# Altium PCB JUNORPC6Cv3.PcbDoc (part 1 of 2)
Units mm, origin at the board's own origin, x right, y up, seen from the top; angles counter-clockwise.
Board outline 175.76 x 100.76 mm, 8 copper layers (Top Layer, Internal Plane 1, Signal Layer 1, Internal Plane 2, Signal Layer 2, Internal Plane 3, Internal Plane 4, Bottom Layer), stack 1.684 mm thick; 107 components, 160 nets, 1032 pads, 524 vias.
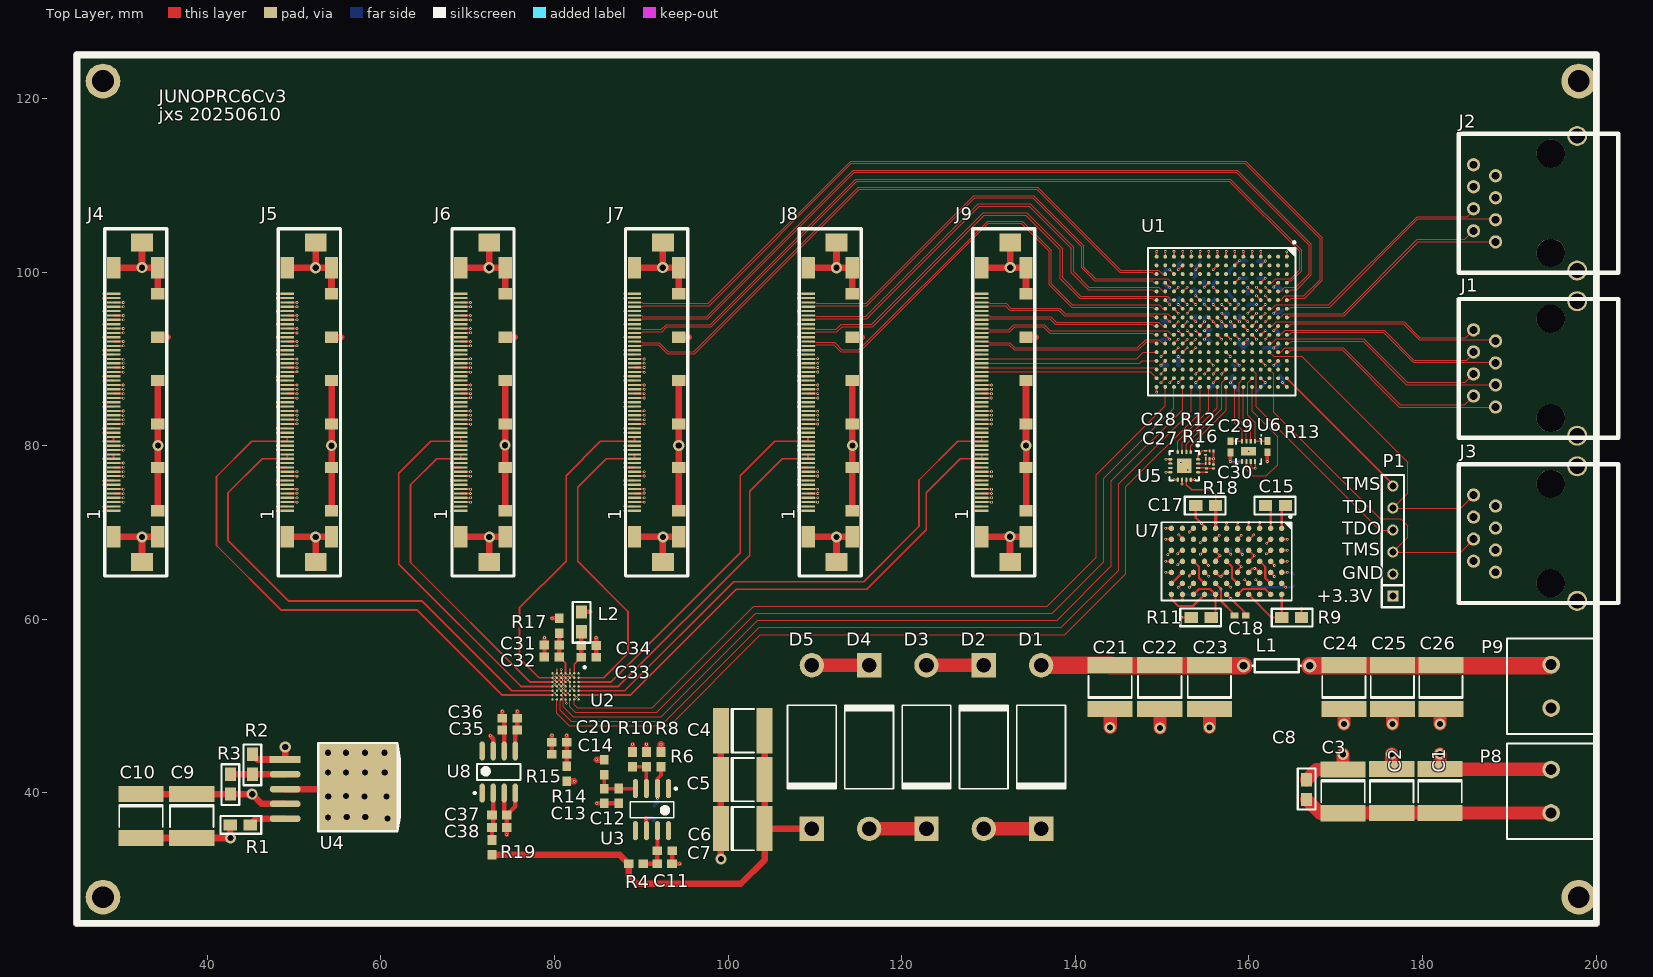
[diagram p0: Top Layer view]
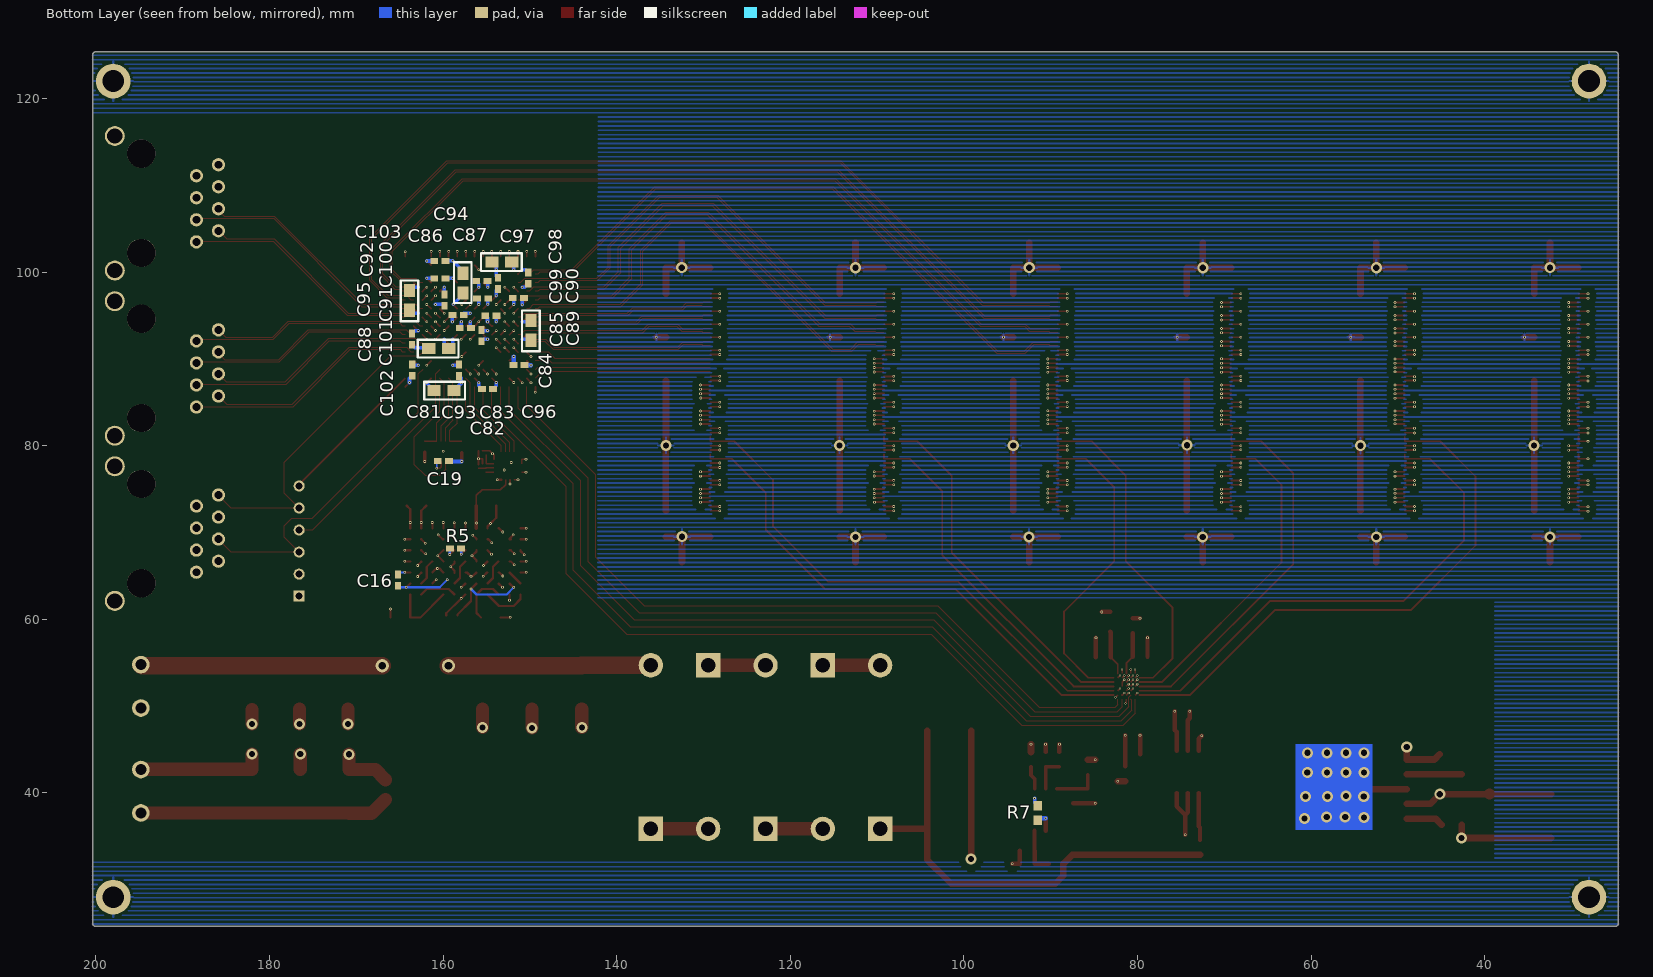
[diagram p1: Bottom Layer view, seen from below]
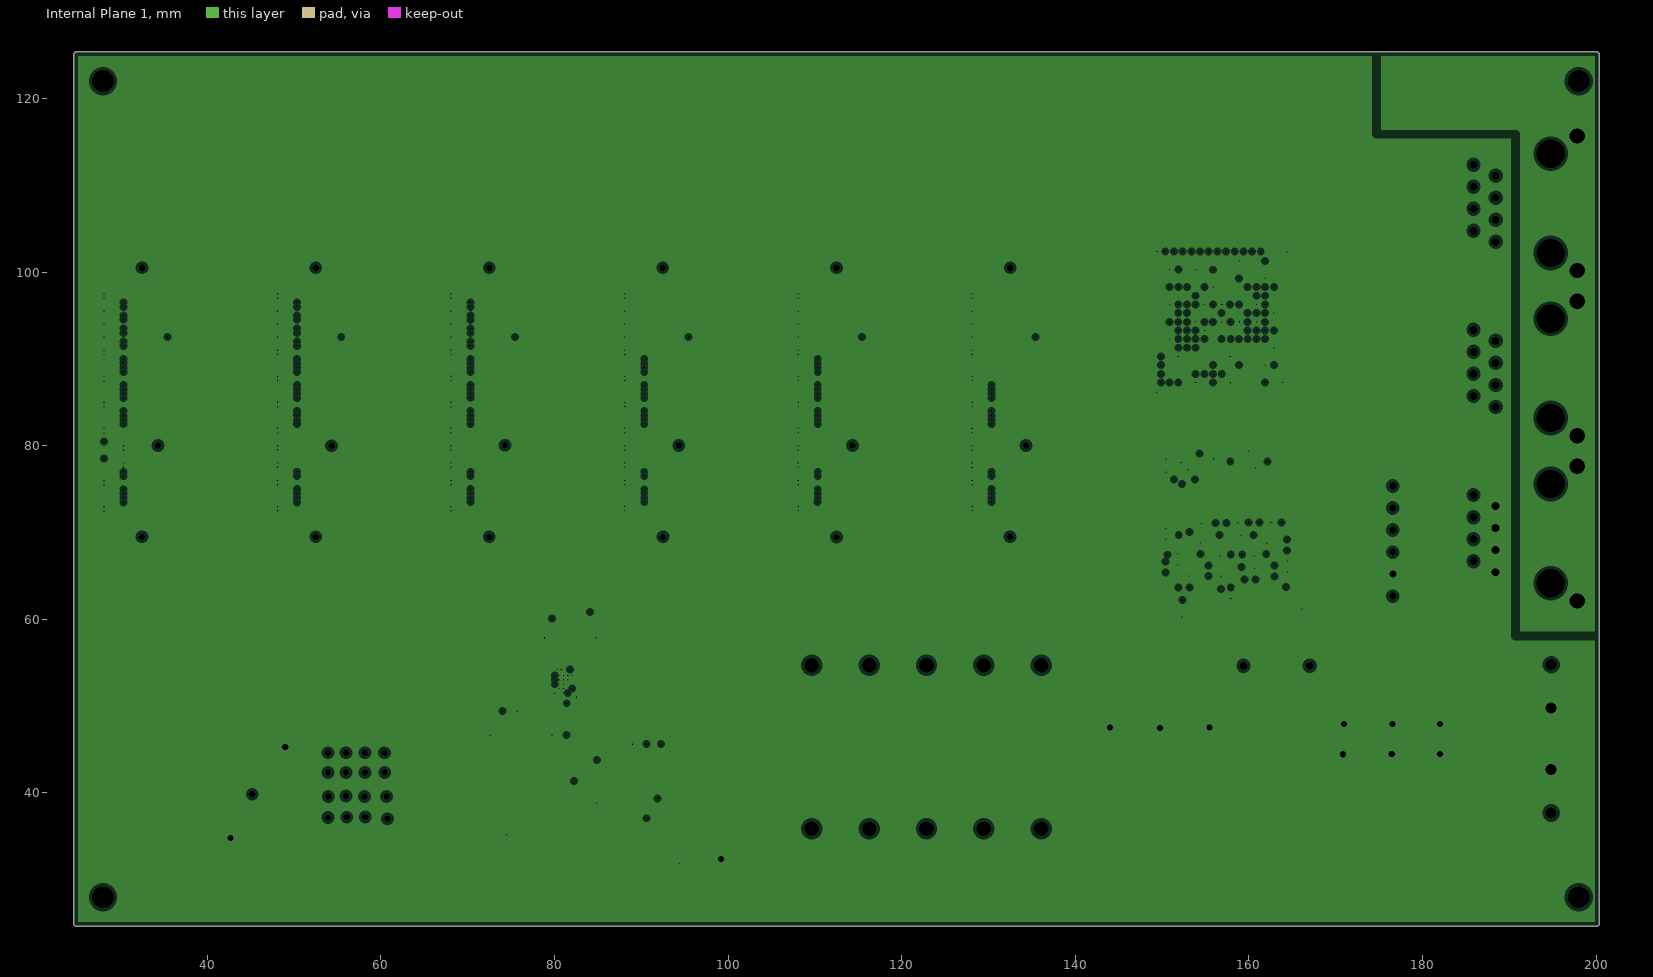
[diagram p2: Internal Plane 1, clearances drawn from the general rule]
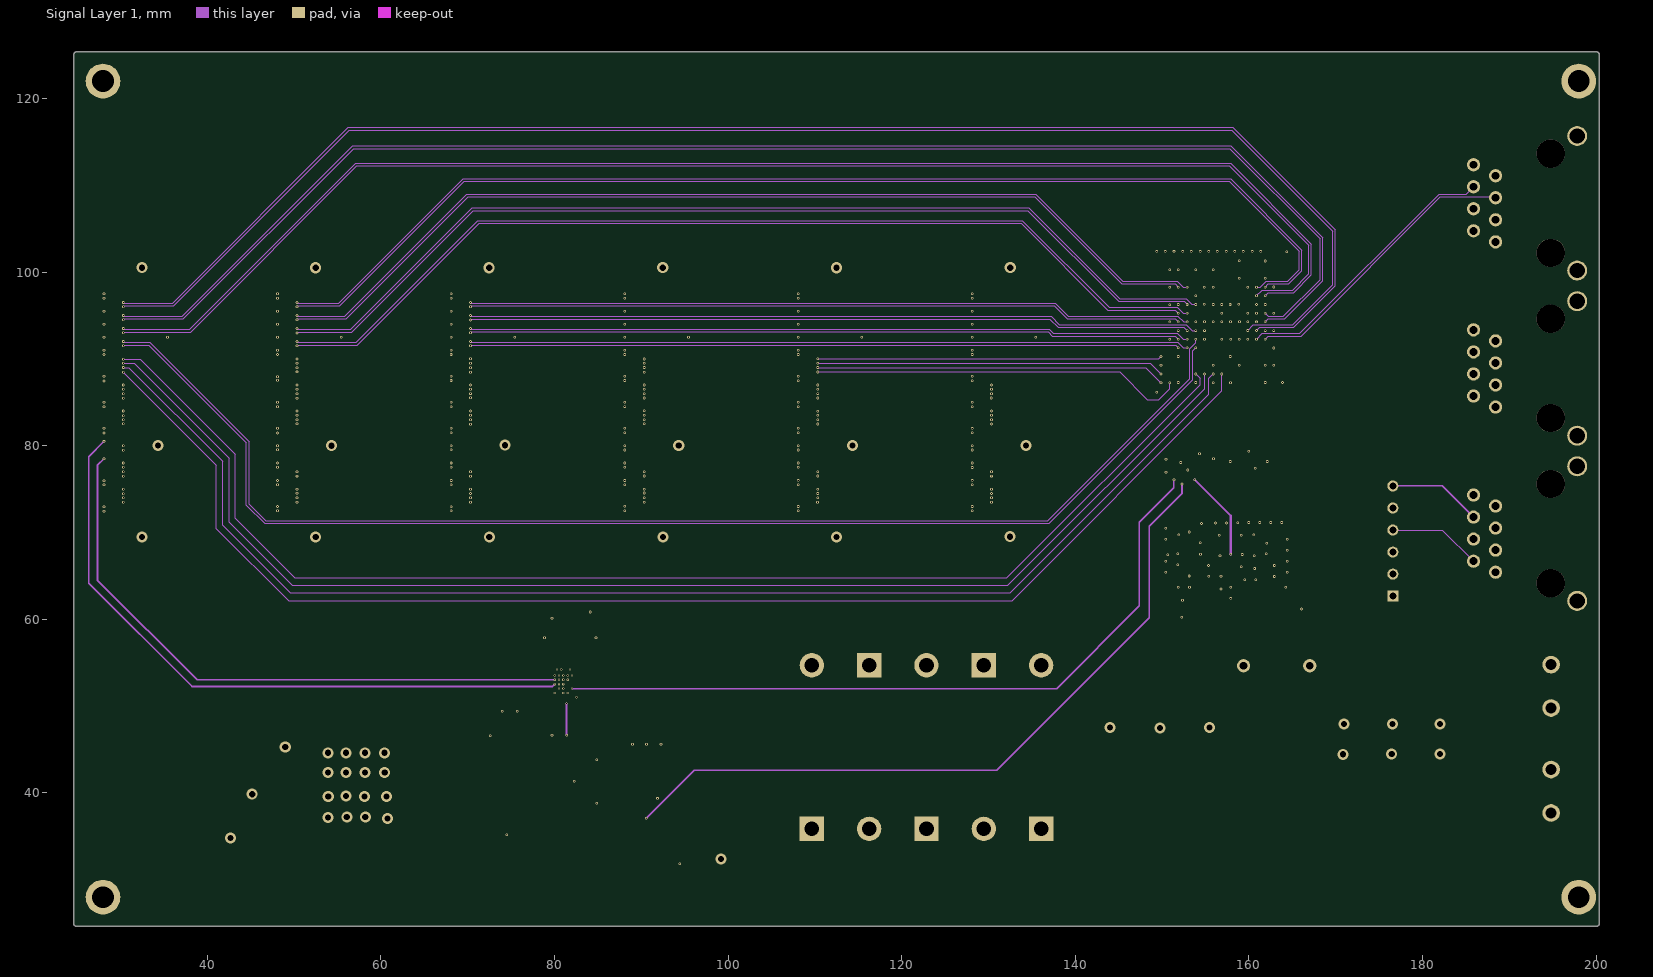
[diagram p3: Signal Layer 1]
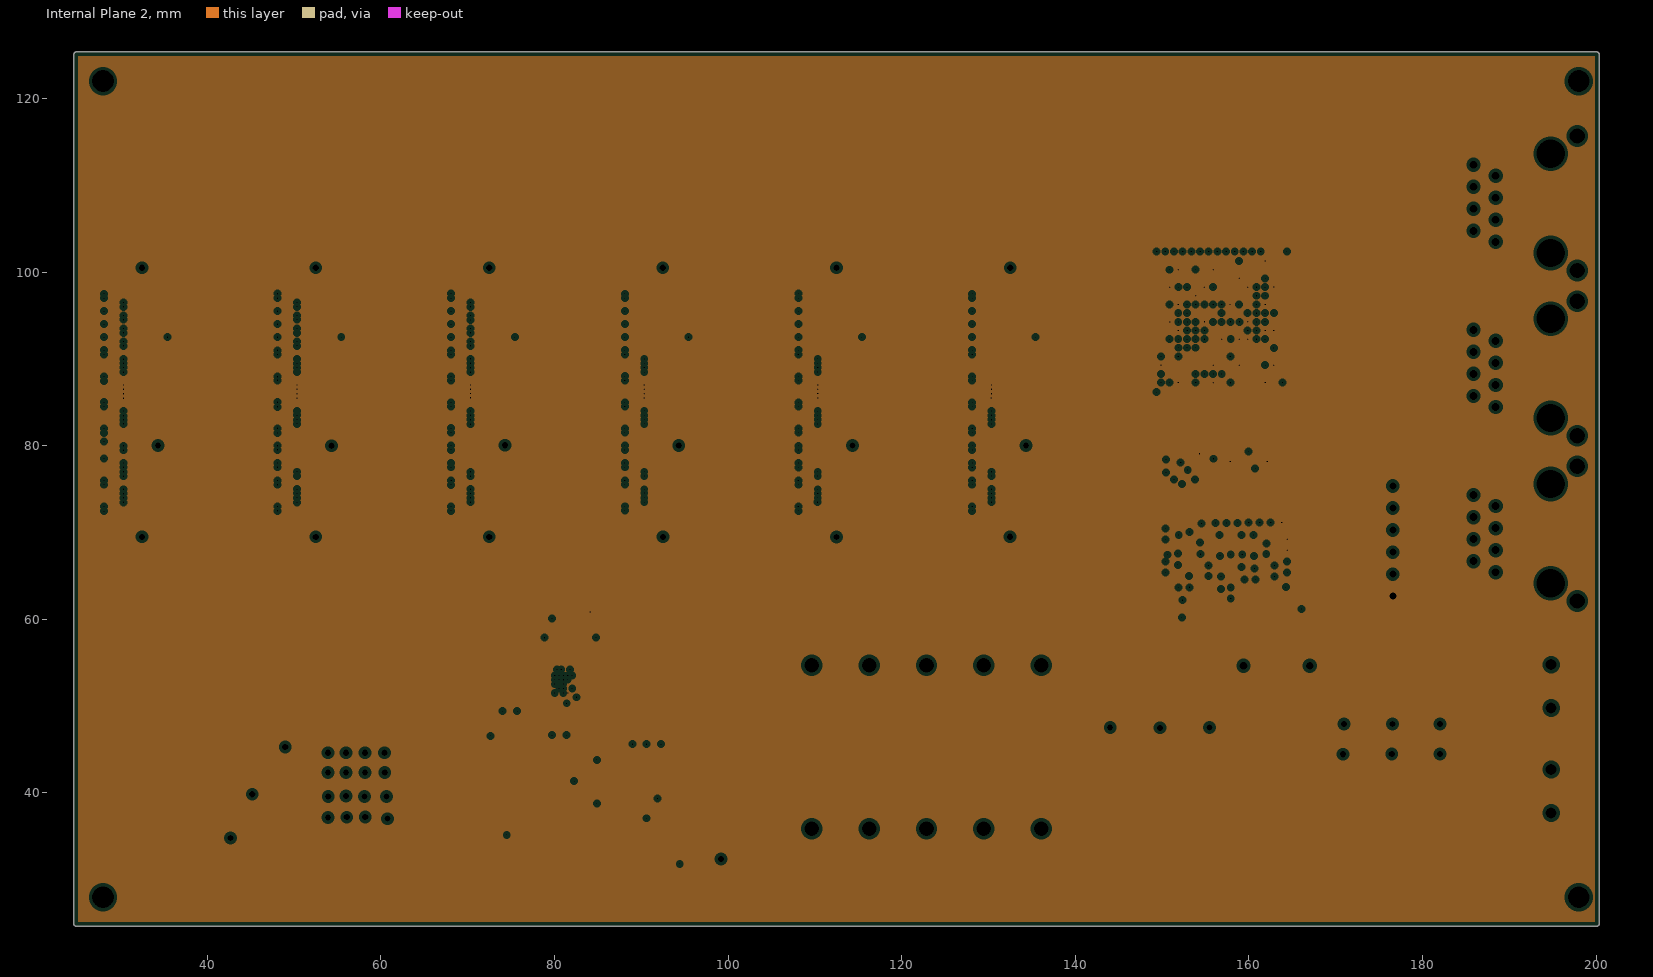
[diagram p4: Internal Plane 2, clearances drawn from the general rule]
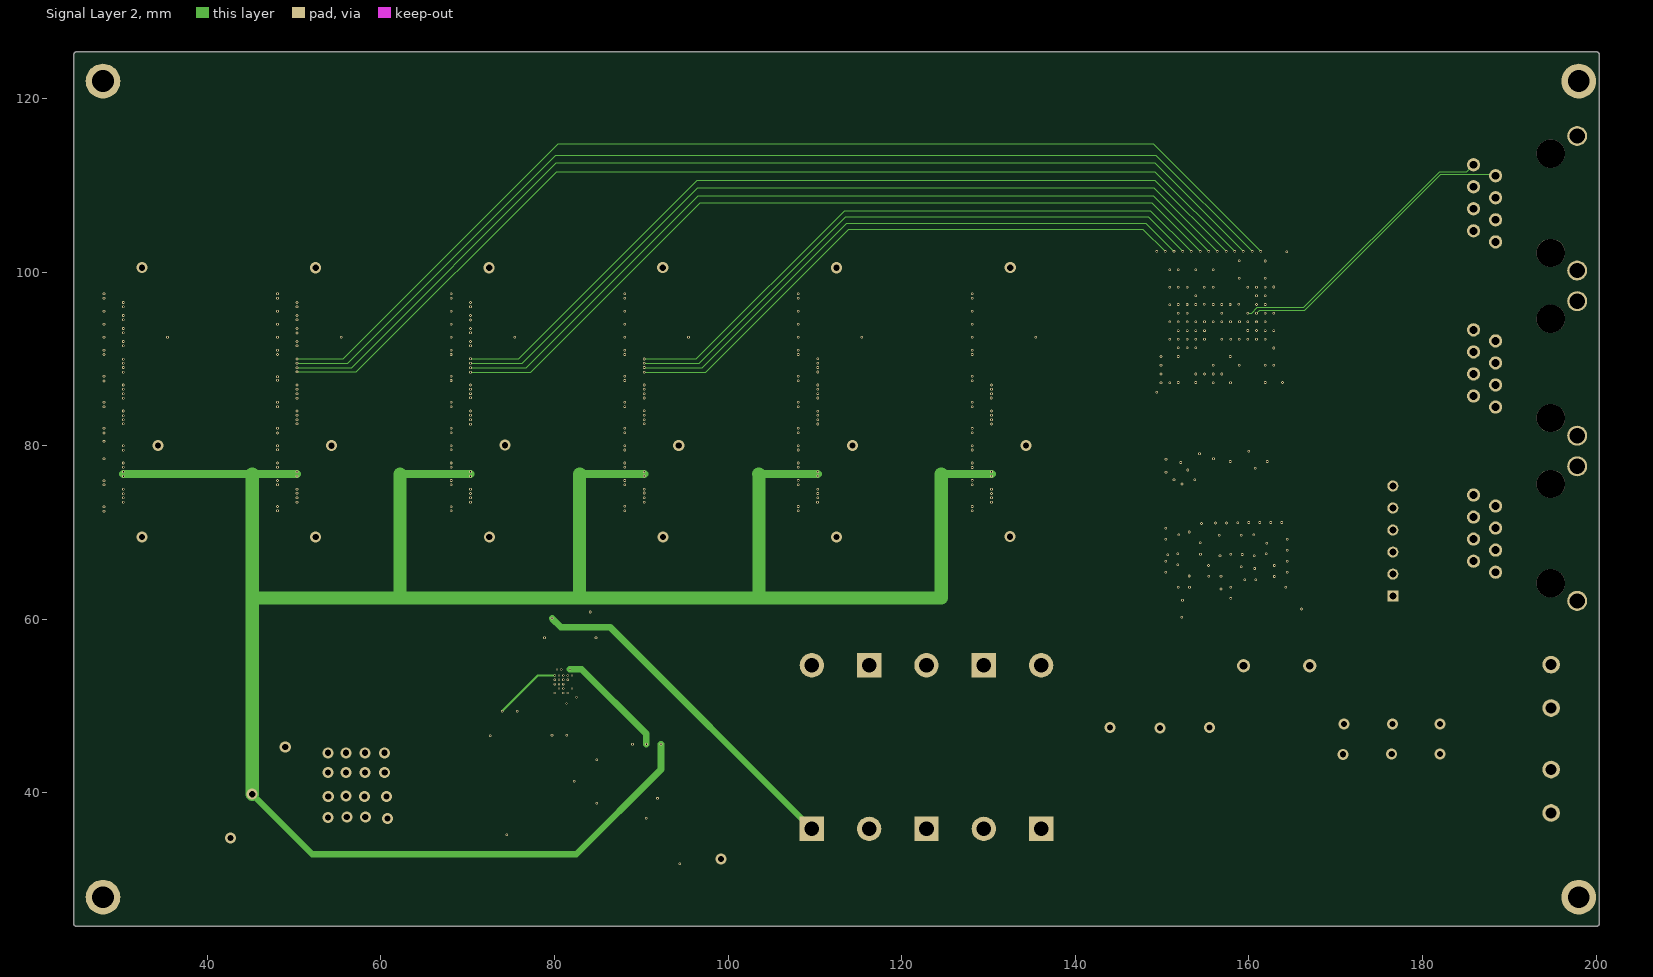
[diagram p5: Signal Layer 2]
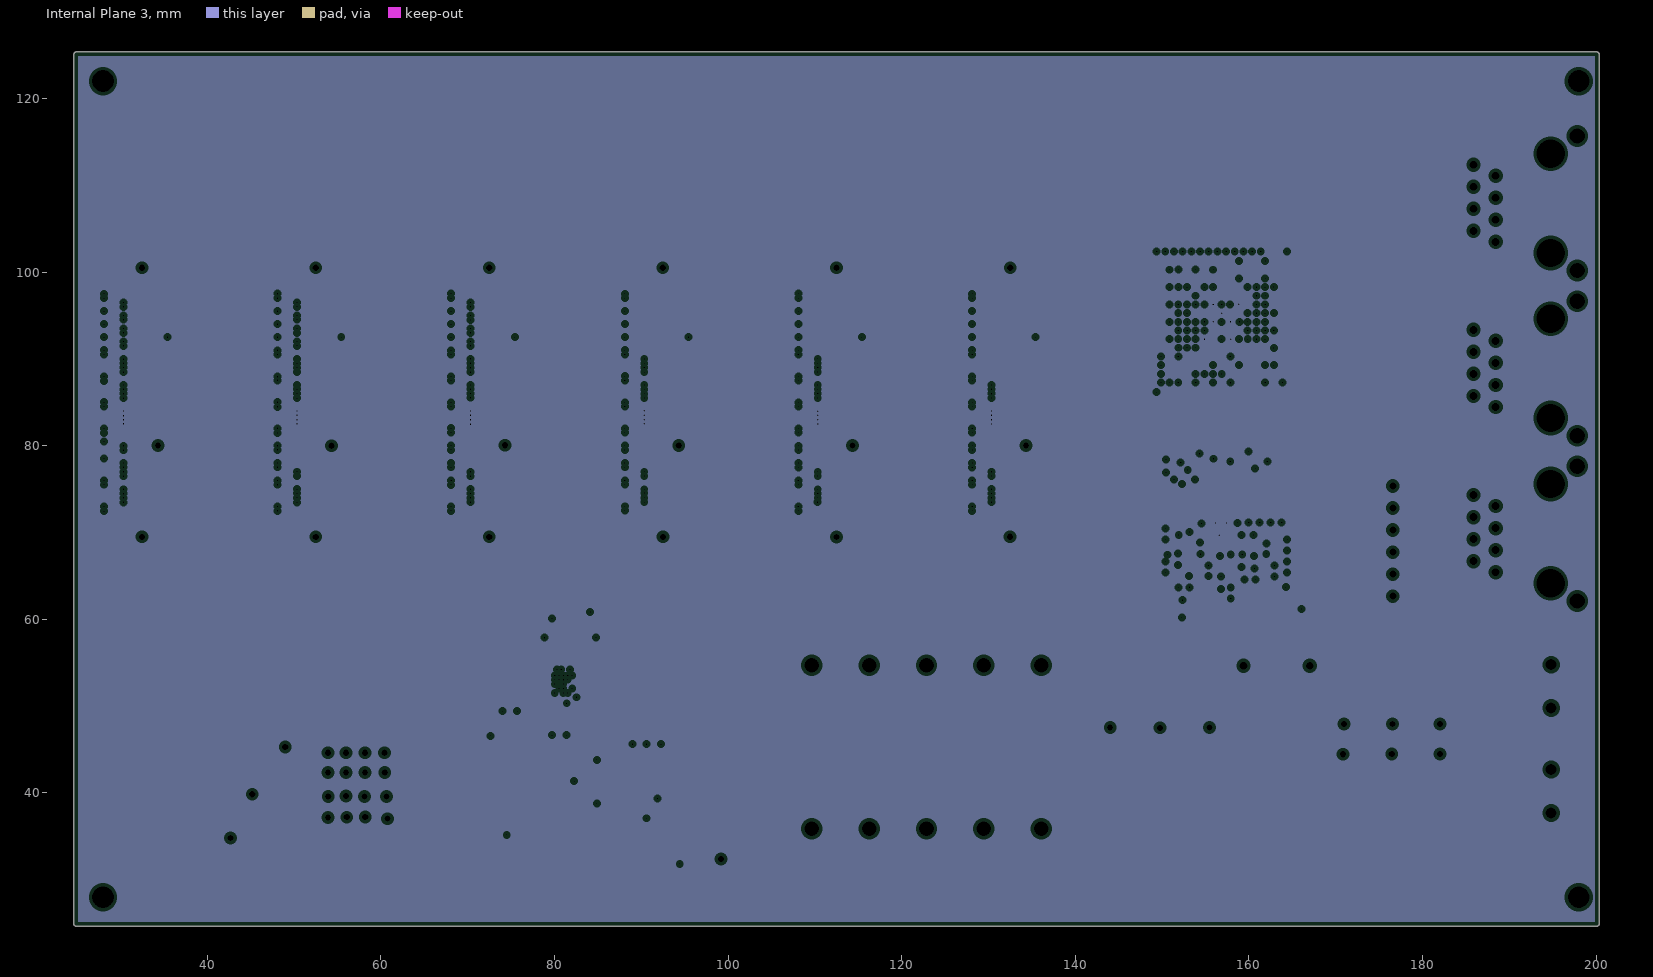
[diagram p6: Internal Plane 3, clearances drawn from the general rule]
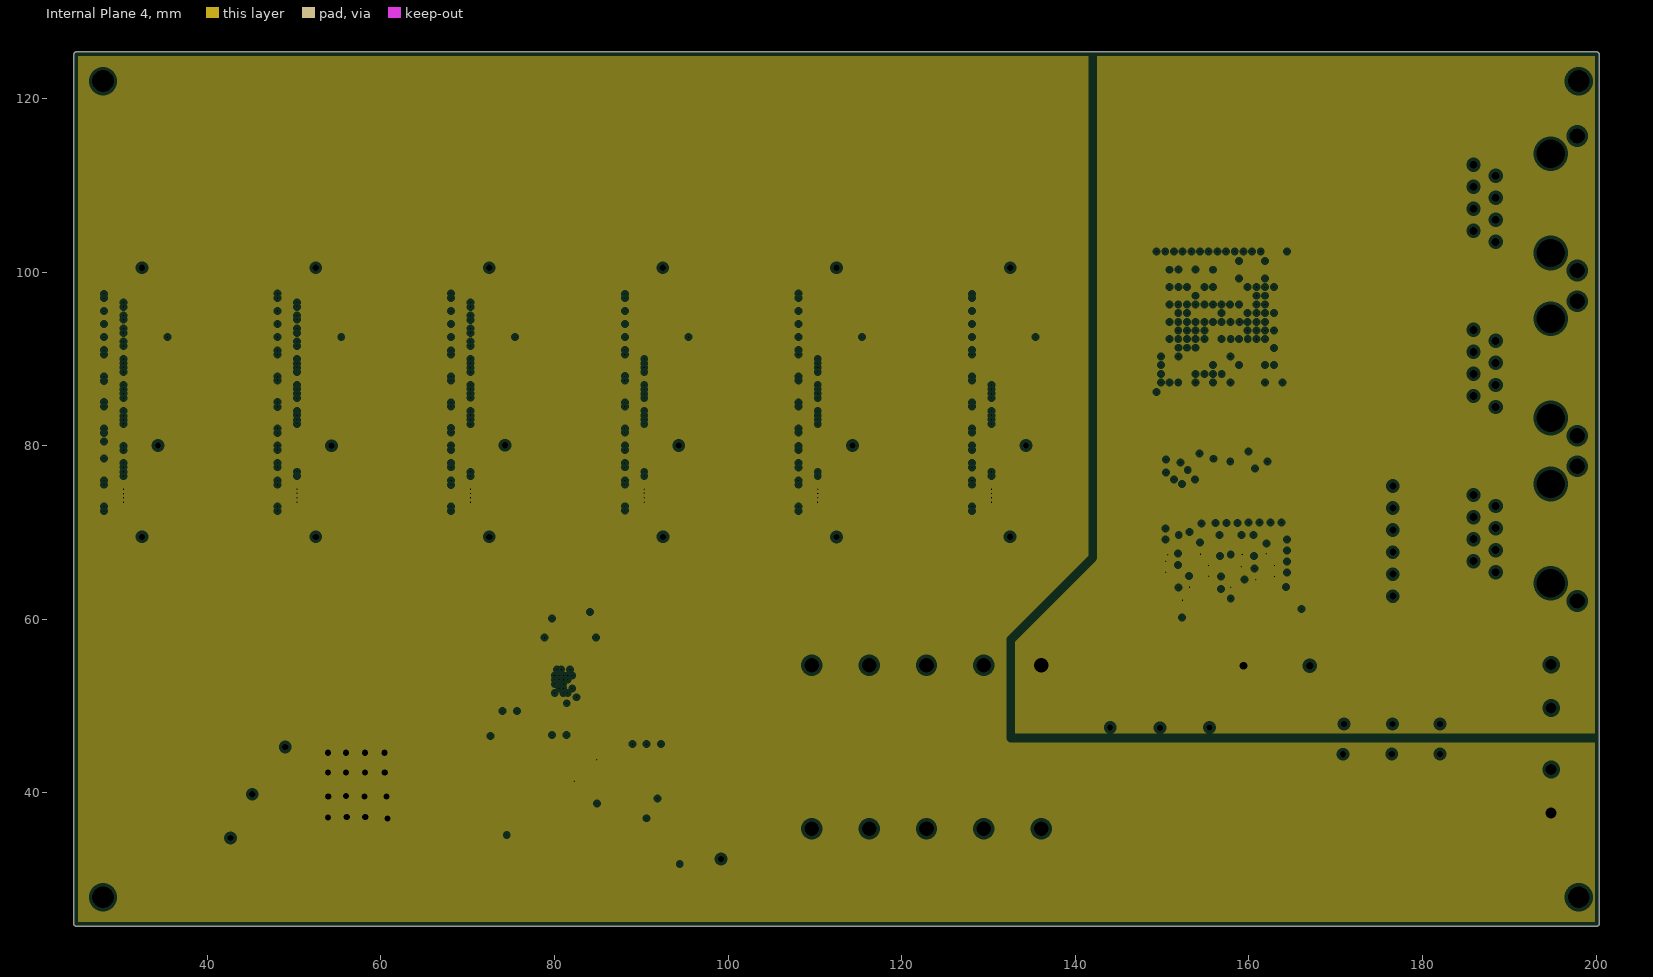
[diagram p7: Internal Plane 4, clearances drawn from the general rule]

## Layer stack, top to bottom
Top Solder: solder mask 0.0102, Solder Resist, Dk 3.5
Top Layer: signal copper 0.0356
Dielectric 1: core 0.254, FR-4, Dk 4.2
Internal Plane 1: plane copper 0.036, net GND
Dielectric 6: prepreg 0.127, Dk 4.2
Signal Layer 1: signal copper 0.036
Dielectric 3: core 0.254, Dk 4.2
Internal Plane 2: plane copper 0.036, net +3.3V
Dielectric 7: prepreg 0.127, Dk 4.2
Signal Layer 2: signal copper 0.036
Dielectric 2: core 0.254, Dk 4.2
Internal Plane 3: plane copper 0.036, net +1.2V
Dielectric 5: prepreg 0.127, Dk 4.2
Internal Plane 4: plane copper 0.036, net (Multiple Nets)
Dielectric 4: core 0.254, Dk 4.2
Bottom Layer: signal copper 0.0356
Bottom Solder: solder mask 0.0102, Solder Resist, Dk 3.5

## Board outline
25,24.619 cw(c25,25) 24.619,25 24.619,125 cw(c25,125) 25,125.381 200,125.381 cw(c200,125) 200.381,125 200.381,25 cw(c200,25) 200,24.619

## Design rules (kind name [scope] priority, off if disabled: settings)
Clearance [All] p1: gap=0 ignorepadtopadclearanceinfootprint=FALSE
ComponentClearance [All] p1: gap=0 collisioncheckmode=3 verticalgap=0 showdistances=FALSE
DiffPairsRouting [All] p1: maxlimit=0.254 minlimit=0.152 mostfreqgap=0.203 toplayer_prefgap=0.152 toplayer_minwidth=0.102 toplayer_maxwidth=0.381 toplayer_prefwidth=0.102 midlayer1_minwidth=0.102 midlayer1_maxwidth=0.381 midlayer1_prefwidth=0.102 midlayer2_minwidth=0.102 midlayer2_maxwidth=0.381 midlayer2_prefwidth=0.102 bottomlayer_prefgap=0.152 bottomlayer_minwidth=0.102 bottomlayer_maxwidth=0.381 bottomlayer_prefwidth=0.102 maxuncoupledlength=12.7
HoleSize [All] p1: absolutevalues=TRUE maxlimit=5.08 minlimit=0.025 maxpercent=80.000 minpercent=20.000
HoleToHoleClearance [All] p1: gap=0 allowstackedmicrovias=TRUE
MinimumSolderMaskSliver [All] p1: minsoldermaskwidth=0
PlaneClearance [All] p1: clearance=0.381
PlaneConnect [All] p1: planeconnectstyle=Direct reliefexpansion=0.508 reliefentries=4 reliefconductorwidth=0.254 reliefairgap=0.254
PolygonConnect [All] p1: connectstyle=Relief reliefconductorwidth=0.254 reliefentries=4 polygonreliefangle="90 Angle" airgapwidth=0.254
RoutingVias [All] p1: holewidth=0.711 width=1.27 viastyle="Through Hole" minholewidth=0.102 minwidth=0.178 maxholewidth=7.62 maxwidth=5.08
SilkToSilkClearance [All] p1: silktosilkclearance=0
SilkToSolderMaskClearance [IsPad] p1: minsilkscreentomaskgap=0 clearancetoexposedcopper=TRUE
SolderMaskExpansion [All] p1: expansion=0.102
Width [All] p1: maxlimit=2.54 minlimit=0.102 preferedwidth=0.102 minimp=50.000000 maximp=50.000000 favimp=50.000000
21 further rules are at their usual default settings.

## Classes and differential pairs
component class XC6SLX09-2FTG256C: C81 C82 C83 C84 C85 C86 C87 C88 C89 C90 C91 C92 C93 C94 C95 C96 C97 C98 C99 C100 C101 C102 C103 P1 U1
component class power: C1 C2 C3 C4 C5 C6 C7 C8 C9 C10 C11 C12 C13 C14 C15 C16 C17 C18 C20 C21 C22 C23 C24 C25 C26 C27 C28 C29 C30 C31 C32 C33 C34 C35 C36 C37 C38 D1 D2 D3 D4 D5 L1 L2 P8 P9 R1 R2 R3 R4 R5 R6 R7 R8 R9 R10 R11 R14 R15 R16 R17 R18 R19 R? U2 U3 U4 U5 U7 U8
component class main: C19 J1 J2 J3 J4 J5 J6 J7 J8 J9 R12 R13 U6
differential pair RESET6_LVDS33: +RESET6_LVDS33_P -RESET6_LVDS33_N
differential pair RESET5_LVDS33: +RESET5_LVDS33_P -RESET5_LVDS33_N
differential pair RESET4_LVDS33: +RESET4_LVDS33_P -RESET4_LVDS33_N
differential pair RESET3_LVDS33: +RESET3_LVDS33_P -RESET3_LVDS33_N
differential pair RESET2_LVDS33: +RESET2_LVDS33_P -RESET2_LVDS33_N
differential pair RESET1_LVDS33: +RESET1_LVDS33_P -RESET1_LVDS33_N
differential pair FB6_LVDS33: +FB6_LVDS33_P -FB6_LVDS33_N
differential pair FB5_LVDS33: +FB5_LVDS33_P -FB5_LVDS33_N
differential pair FB4_LVDS33: +FB4_LVDS33_P -FB4_LVDS33_N
differential pair FB3_LVDS33: +FB3_LVDS33_P -FB3_LVDS33_N
differential pair FB2_LVDS33: +FB2_LVDS33_P -FB2_LVDS33_N
differential pair FB1_LVDS33: +FB1_LVDS33_P -FB1_LVDS33_N
differential pair DATA6_LVDS33: +DATA6_LVDS33_P -DATA6_LVDS33_N
differential pair DATA5_LVDS33: +DATA5_LVDS33_P -DATA5_LVDS33_N
differential pair DATA4_LVDS33: +DATA4_LVDS33_P -DATA4_LVDS33_N
differential pair DATA3_LVDS33: +DATA3_LVDS33_P -DATA3_LVDS33_N
differential pair DATA2_LVDS33: +DATA2_LVDS33_P -DATA2_LVDS33_N
differential pair DATA1_LVDS33: +DATA1_LVDS33_P -DATA1_LVDS33_N
differential pair CLK6_LVDS33: +CLK6_LVDS33_P -CLK6_LVDS33_N
differential pair CLK5_LVDS33: +CLK5_LVDS33_P -CLK5_LVDS33_N
differential pair CLK4_LVDS33: +CLK4_LVDS33_P -CLK4_LVDS33_N
differential pair CLK3_LVDS33: +CLK3_LVDS33_P -CLK3_LVDS33_N
differential pair CLK2_LVDS33: +CLK2_LVDS33_P -CLK2_LVDS33_N
differential pair CLK1_LVDS33: +CLK1_LVDS33_P -CLK1_LVDS33_N
differential pair FTMS_LVDS33: +FTMS_LVDS33_P -FTMS_LVDS33_N
differential pair FTDO_LVDS33: +FTDO_LVDS33_P -FTDO_LVDS33_N
differential pair FTDI_LVDS33: +FTDI_LVDS33_P -FTDI_LVDS33_N
differential pair FTCK_LVDS33: +FTCK_LVDS33_P -FTCK_LVDS33_N
differential pair RESET_LVDS33: +RESET_LVDS33_P -RESET_LVDS33_N
differential pair FB_LVDS33: +FB_LVDS33_P -FB_LVDS33_N
differential pair DATA_LVDS33: +DATA_LVDS33_P -DATA_LVDS33_N
differential pair CLK_LVDS33: +CLK_LVDS33_P -CLK_LVDS33_N

## Components (designator, comment, footprint, x,y, rotation, side; value= is the part's Value field where it differs from the comment)
C1 "jc1.0" 2220 182.016,40.208 r270 top value=180uF@16V
C2 "jc1.0" 2220 176.454,40.208 r270 top value=10uF@16V
C3 "jc1.0" 2220 170.84,40.183 r270 top value=10uF@16V
C4 "jc1.0" 2220 101.702,47.168 r0 top value=180uF@16V
C5 "jc1.0" 2220 101.702,41.529 r0 top value=10uF@16V
C6 "jc1.0" 2220 101.702,35.89 r0 top value=10uF@16V
C7 "jc1.0" 0603 92.712,33.325 r180 top value=4.7uF
C8 "jc1.0" 0805 166.649,41.529 r270 top value=0.1uF@16V
C9 "jc1.0" 2220 38.227,37.338 r270 top value=47uF
C10 "jc1.0" 2220 32.385,37.338 r270 top value=0.1uF
C11 "jc1.0" 0603 92.698,31.826 r180 top value=0.1uF
C12 "jc1.0" 0603 87.427,39.661 r90 top value=4.7uF
C13 "jc1.0" 0603 85.725,39.649 r90 top value=0.1uF
C14 "jc1.0" 0603 80.566,44.475 r0 top value=4.7uF
C15 "jc1.0" 0805 161.925,73.101 r0 top value=47uF@6.3V
C16 "jc1.0" 0402 165.202,64.516 r270 bottom value=0.1uF@6.3V
C17 "jc1.0" 0805 153.873,73.101 r0 top value=47uF@6.3V
C18 "jc1.0" 0402 158.979,60.452 r180 top value=0.1uF@6.3V
C19 "jc1.0" 0402 159.965,78.251 r0 bottom value=100nF
C20 "jc1.0" 0603 80.566,45.822 r0 top value=0.1uF
C21 "jc1.0" 2220 144.018,52.197 r90 top value=180uF@16V
C22 "jc1.0" 2220 149.733,52.197 r90 top value=10uF@16V
C23 "jc1.0" 2220 155.448,52.197 r90 top value=10uF@16V
C24 "jc1.0" 2220 170.942,52.197 r90 top value=10uF@16V
C25 "jc1.0" 2220 176.53,52.197 r90 top value=10uF@16V
C26 "jc1.0" 2220 182.118,52.197 r90 top value=180uF@16V
C27 "jc1.0" 0201 155.016,77.934 r0 top value=4.7uF
C28 "jc1.0" 0201 155.016,78.497 r0 top value=0.1uF
C29 "jc1.0" 0201 155.481,79.412 r0 top value=0.1uF
C30 "jc1.0" 0201 155.931,77.38 r90 top value=1nF
C31 "jc1.0" 0603 79.705,57.039 r0 top value=4.7uF
C32 "jc1.0" 0603 79.705,55.667 r0 top value=0.1uF
C33 "jc1.0" 0603 83.947,55.617 r180 top value=4.7uF
C34 "jc1.0" 0603 83.947,56.988 r180 top value=0.1uF
C35 "jc1.0" 0603 74.854,47.244 r180 top value=4.7uF
C36 "jc1.0" 0603 74.854,48.59 r180 top value=0.1uF
C37 "jc1.0" 0603 73.66,37.465 r180 top value=4.7uF
C38 "jc1.0" 0603 73.66,36.017 r180 top value=0.1uF
C81 "jc1.0" 0805 158.748,86.353 r0 bottom value=100uF
C82 "jc1.0" 0402 158.164,88.689 r90 bottom value=4.7uF
C83 "jc1.0" 0402 154.887,86.556 r0 bottom value=0.47uF
C84 "jc1.0" 0402 151.257,89.274 r180 bottom value=0.47uF
C85 "jc1.0" 0805 149.885,92.151 r90 bottom value=100uF
C86 "jc1.0" 0402 160.374,101.286 r0 bottom value=4.7uF
C87 "jc1.0" 0402 155.522,98.976 r180 bottom value=0.47uF
C88 "jc1.0" 0805 161.646,91.186 r180 bottom value=100uF
C89 "jc1.0" 0402 154.493,94.971 r0 bottom value=4.7uF
C90 "jc1.0" 0402 153.695,98.704 r270 bottom value=0.47uF
C91 "jc1.0" 0402 159.864,96.774 r90 bottom value=0.47uF
C92 "jc1.0" 0805 157.734,99.873 r270 bottom value=100uF
C93 "jc1.0" 0402 157.427,93.566 r0 bottom value=4.7uF
C94 "jc1.0" 0402 155.448,96.952 r0 bottom value=4.7uF
C95 "jc1.0" 0402 158.265,95.039 r180 bottom value=4.7uF
C96 "jc1.0" 0402 155.598,92.677 r270 bottom value=0.47uF
C97 "jc1.0" 0805 154.381,101.143 r180 bottom value=100uF
C98 "jc1.0" 0402 150.19,99.314 r270 bottom value=4.7uF
C99 "jc1.0" 0402 151.331,97.021 r0 bottom value=0.47uF
C100 "jc1.0" 0805 163.872,95.606 r90 bottom value=100uF
C101 "jc1.0" 0402 163.574,92.278 r90 bottom value=4.7uF
C102 "jc1.0" 0402 163.551,88.712 r90 bottom value=0.47uF
C103 "jc1.0" 0402 160.376,99.281 r180 bottom value=0.47uF
D1 "Diode 1N5408" DO-201AD 136.068,45.288 r270 top
D2 "Diode 1N5408" DO-201AD 129.464,45.288 r90 top
D3 "Diode 1N5408" DO-201AD 122.86,45.288 r270 top
D4 "Diode 1N5408" DO-201AD 116.256,45.288 r90 top
D5 "Diode 1N5408" DO-201AD 109.652,45.288 r270 top
J1 "RJ45_shield" RJ45_shield 185.877,88.9 r90 top
J2 "RJ45_shield" RJ45_shield 185.877,107.925 r90 top
J3 "RJ45_shield" RJ45_shield 185.877,69.875 r90 top
J4 "JAE FI-RE51S" FI-RE51S-VF 30,85 r90 top locked
J5 "JAE FI-RE51S" FI-RE51S-VF 50,85 r90 top locked
J6 "JAE FI-RE51S" FI-RE51S-VF 70,85 r90 top locked
J7 "JAE FI-RE51S" FI-RE51S-VF 90,85 r90 top locked
J8 "JAE FI-RE51S" FI-RE51S-VF 110,85 r90 top locked
J9 "JAE FI-RE51S" FI-RE51S-VF 130,85 r90 top locked
L1 "Inductor" "AXIAL0.3 - 35" 159.385,54.657 r0 top value=10uH
L2 "Inductor" 0805 83.134,58.563 r90 top value=100uH
P1 "FPGAJTAG" SIP6 176.581,62.662 r90 top
P8 "PowerPlug1" POWERPLUG1 194.818,37.697 r90 top
P9 "PowerPlug1" POWERPLUG1 194.818,54.784 r270 top
R1 "jr1.0" 0805 44.958,36.322 r180 top value=4.3kohm
R2 "jr1.0" 0805 45.212,42.164 r90 top value=2.37kohm
R3 "jr1.0" 0805 42.672,39.878 r90 top value=2.87kohm
R4 "jr1.0" 0603 89.408,31.826 r180 top value=3ohm
R5 "jr1.0" 0402 158.572,68.174 r180 bottom value=114kohm
R6 "jr1.0" 0603 92.278,43.866 r270 top value=1kohm
R7 "jr1.0" 0603 91.491,37.694 r270 bottom value=500ohm
R8 "jr1.0" 0603 90.602,43.866 r270 top value=1kohm
R9 "jr1.0" 0805 166.065,60.198 r180 top value=6.65kohm
R10 "jr1.0" 0603 89.002,43.866 r270 top value=1kohm
R11 "jr1.0" 0805 153.365,60.223 r0 top value=30.2kohm
R12 "jr1.0" 0402 157.861,79.858 r90 top value=4.7kohm
R13 "jr1.0" 0402 162.124,79.902 r90 top value=4.7kohm
R14 "jr1.0" 0603 85.725,42.963 r270 top value=3ohm
R15 "jr1.0" 0603 81.416,42.215 r90 top value=3ohm
R16 "jr1.0" 0201 155.016,78.962 r90 top value=3
R17 "jr1.0" 0603 80.569,59.261 r270 top value=3ohm
R18 "jr1.0" 0201 155.092,77.38 r270 top value=1K
R19 "jr1.0" 0603 72.81,33.731 r90 top value=3ohm
U1 "XC6SLX9-2FTG256C" FTG256 156.87,94.274 r270 top locked
U2 "AD5766BCBZ-RL7" WLCSP-49 81.288,52.273 r270 top locked
U3 "OP07D" R8(SOP127P600-8N) 91.237,38.075 r270 top
U4 "LT1185CQ" "LP5 - 1185" 48.998,43.859 r0 top
U5 "ADS7924" QFN50P300X300X80_HS-17N 152.552,77.684 r270 top
U6 "GXHT30" GXHT30 159.969,79.35 r270 top
U7 "LTM4644IY#PBF" BGA77C127P7X11_900X1500X521 157.429,66.675 r270 top locked
U8 "ADR4525ARZ" R8(SOP127P600-8N) 73.584,42.418 r90 top

## Footprints (in the part's own frame and the unit in brackets; to place one, negate y for a bottom-side part, rotate by r counter-clockwise, add the part's x,y. Pads: shape width x height; smd on the part's side, far side on the other; paste and mask are expansions set on the pad)
0201 [mm]
  rect 0.2x0.35 smd mask+0.05: 1(0,0) 2(0.45,0)
0402 [mm] "Chip Capacitor; Body 1.0 x 0.5 mm (LxW typ)"
  rect 0.9x0.7 smd: 1(-0.65,0) 2(0.65,0)
0603 [mm] "Chip Capacitor; Body 1.6 x 0.8 mm (LxW typ)"
  rect 1.1x1 smd: 1(-0.85,0) 2(0.85,0)
0805 [mil]
  rect 60x50 smd: 1(0,0) 2(90,0)
  silkscreen extent -50,-40 135,40
2220 [mm] "Chip Capacitor; Body 5.7 x 5.0 mm (LxW typ)"
  rect 1.85x5.2 smd: 1(-2.525,0) 2(2.525,0)
  silkscreen extent -1.3,-2.5 1.3,2.5
"AXIAL0.3 - 35" [mil]
  round 60 hole 35: 1(0,0) 2(300,0)
  silkscreen extent 41,-30 259,30
BGA77C127P7X11_900X1500X521 [mm] "BGA, 77-Leads, Body 9.00x15.00mmx5.21mm, Pitch 1.27mm"
  round 0.63 smd: A1(-3.81,6.35) A2(-2.54,6.35) A3(-1.27,6.35) A4(0,6.35) A5(1.27,6.35) A6(2.54,6.35) A7(3.81,6.35) B1(-3.81,5.08) B2(-2.54,5.08) B3(-1.27,5.08) B4(0,5.08) B5(1.27,5.08) B6(2.54,5.08) B7(3.81,5.08) C1(-3.81,3.81) C2(-2.54,3.81) C3(-1.27,3.81) C4(0,3.81) C5(1.27,3.81) C6(2.54,3.81) C7(3.81,3.81) D1(-3.81,2.54) D2(-2.54,2.54) D3(-1.27,2.54) D4(0,2.54) D5(1.27,2.54) D6(2.54,2.54) D7(3.81,2.54) E1(-3.81,1.27) E2(-2.54,1.27) E3(-1.27,1.27) E4(0,1.27) E5(1.27,1.27) E6(2.54,1.27) E7(3.81,1.27) F1(-3.81,0) F2(-2.54,0) F3(-1.27,0) F4(0,0) F5(1.27,0) F6(2.54,0) F7(3.81,0) G1(-3.81,-1.27) G2(-2.54,-1.27) G3(-1.27,-1.27) G4(0,-1.27) G5(1.27,-1.27) G6(2.54,-1.27) G7(3.81,-1.27) H1(-3.81,-2.54) H2(-2.54,-2.54) H3(-1.27,-2.54) H4(0,-2.54) H5(1.27,-2.54) H6(2.54,-2.54) H7(3.81,-2.54) J1(-3.81,-3.81) J2(-2.54,-3.81) J3(-1.27,-3.81) J4(0,-3.81) J5(1.27,-3.81) J6(2.54,-3.81) J7(3.81,-3.81) K1(-3.81,-5.08) K2(-2.54,-5.08) K3(-1.27,-5.08) K4(0,-5.08) K5(1.27,-5.08) K6(2.54,-5.08) K7(3.81,-5.08) L1(-3.81,-6.35) L2(-2.54,-6.35) L3(-1.27,-6.35) L4(0,-6.35) L5(1.27,-6.35) L6(2.54,-6.35) L7(3.81,-6.35)
  silkscreen extent -5.27,-7.5 4.5,7.5, body extent -4.5,-7.5 4.5,7.5, height 5.21
DO-201AD [mm] "Diode, Axial; Body 9.5 x 5.6 mm (LxDia. max), Lead Dia. 1.32 mm (max)"
  round 2.8 hole 1.7: 1(-9.42,0)
  rect 2.8x2.8 hole 1.7: 2(9.42,0)
  silkscreen extent -4.8,-2.8 4.9,2.8
FI-RE51S-VF [mm] "JAE, connector for Internal Serial Transmission, Striaight, shell, 51pin"
  rect 0.25x1.55 smd: 1(-12.5,0.775) 2(-12,0.775) 3(-11.5,0.775) 4(-11,0.775) 5(-10.5,0.775) 6(-10,0.775) 7(-9.5,0.775) 8(-9,0.775) 9(-8.5,0.775) 10(-8,0.775) 11(-7.5,0.775) 12(-7,0.775) 13(-6.5,0.775) 14(-6,0.775) 15(-5.5,0.775) 16(-5,0.775) 17(-4.5,0.775) 18(-4,0.775) 19(-3.5,0.775) 20(-3,0.775) 21(-2.5,0.775) 22(-2,0.775) 23(-1.5,0.775) 24(-1,0.775) 25(-0.5,0.775) 26(0,0.775) 27(0.5,0.775) 28(1,0.775) 29(1.5,0.775) 30(2,0.775) 31(2.5,0.775) 32(3,0.775) 33(3.5,0.775) 34(4,0.775) 35(4.5,0.775) 36(5,0.775) 37(5.5,0.775) 38(6,0.775) 39(6.5,0.775) 40(7,0.775) 41(7.5,0.775) 42(8,0.775) 43(8.5,0.775) 44(9,0.775) 45(9.5,0.775) 46(10,0.775) 47(10.5,0.775) 48(11,0.775) 49(11.5,0.775) 50(12,0.775) 51(12.5,0.775)
  rect 2.5x1.55 smd: 52(-15.5,0.775) 53(-15.5,-4.325) 60(15.5,-4.325) 61(15.5,0.775)
  rect 1.3x1.55 smd: 54(-12.5,-4.324) 55(-7.5,-4.325) 56(-2.5,-4.325) 57(2.5,-4.325) 58(7.5,-4.325) 59(12.5,-4.325)
  rect 2.05x2.5 smd: 62(-18.4,-2.5) 63(18.4,-2.5)
  silkscreen extent -20,-5.35 20,1.8
FTG256 [mm] "BGA, 256-Leads, Body 17x17mm, Pitch 1mm"
  round 0.45 smd: A1(-7.5,7.5) A2(-6.5,7.5) A3(-5.5,7.5) A4(-4.5,7.5) A5(-3.5,7.5) A6(-2.5,7.5) A7(-1.5,7.5) A8(-0.5,7.5) A9(0.5,7.5) A10(1.5,7.5) A11(2.5,7.5) A12(3.5,7.5) A13(4.5,7.5) A14(5.5,7.5) A15(6.5,7.5) A16(7.5,7.5) B1(-7.5,6.5) B2(-6.5,6.5) B3(-5.5,6.5) B4(-4.5,6.5) B5(-3.5,6.5) B6(-2.5,6.5) B7(-1.5,6.5) B8(-0.5,6.5) B9(0.5,6.5) B10(1.5,6.5) B11(2.5,6.5) B12(3.5,6.5) B13(4.5,6.5) B14(5.5,6.5) B15(6.5,6.5) B16(7.5,6.5) C1(-7.5,5.5) C2(-6.5,5.5) C3(-5.5,5.5) C4(-4.5,5.5) C5(-3.5,5.5) C6(-2.5,5.5) C7(-1.5,5.5) C8(-0.5,5.5) C9(0.5,5.5) C10(1.5,5.5) C11(2.5,5.5) C12(3.5,5.5) C13(4.5,5.5) C14(5.5,5.5) C15(6.5,5.5) C16(7.5,5.5) D1(-7.5,4.5) D2(-6.5,4.5) D3(-5.5,4.5) D4(-4.5,4.5) D5(-3.5,4.5) D6(-2.5,4.5) D7(-1.5,4.5) D8(-0.5,4.5) D9(0.5,4.5) D10(1.5,4.5) D11(2.5,4.5) D12(3.5,4.5) D13(4.5,4.5) D14(5.5,4.5) D15(6.5,4.5) D16(7.5,4.5) E1(-7.5,3.5) E2(-6.5,3.5) E3(-5.5,3.5) E4(-4.5,3.5) E5(-3.5,3.5) E6(-2.5,3.5) E7(-1.5,3.5) E8(-0.5,3.5) E9(0.5,3.5) E10(1.5,3.5) E11(2.5,3.5) E12(3.5,3.5) E13(4.5,3.5) E14(5.5,3.5) E15(6.5,3.5) E16(7.5,3.5) F1(-7.5,2.5) F2(-6.5,2.5) F3(-5.5,2.5) F4(-4.5,2.5) F5(-3.5,2.5) F6(-2.5,2.5) F7(-1.5,2.5) F8(-0.5,2.5) F9(0.5,2.5) F10(1.5,2.5) F11(2.5,2.5) F12(3.5,2.5) F13(4.5,2.5) F14(5.5,2.5) F15(6.5,2.5) F16(7.5,2.5) G1(-7.5,1.5) G2(-6.5,1.5) G3(-5.5,1.5) G4(-4.5,1.5) G5(-3.5,1.5) G6(-2.5,1.5) G7(-1.5,1.5) G8(-0.5,1.5) G9(0.5,1.5) G10(1.5,1.5) G11(2.5,1.5) G12(3.5,1.5) G13(4.5,1.5) G14(5.5,1.5) G15(6.5,1.5) G16(7.5,1.5) H1(-7.5,0.5) H2(-6.5,0.5) H3(-5.5,0.5) H4(-4.5,0.5) H5(-3.5,0.5) H6(-2.5,0.5) H7(-1.5,0.5) H8(-0.5,0.5) H9(0.5,0.5) H10(1.5,0.5) H11(2.5,0.5) H12(3.5,0.5) H13(4.5,0.5) H14(5.5,0.5) H15(6.5,0.5) H16(7.5,0.5) J1(-7.5,-0.5) J2(-6.5,-0.5) J3(-5.5,-0.5) J4(-4.5,-0.5) J5(-3.5,-0.5) J6(-2.5,-0.5) J7(-1.5,-0.5) J8(-0.5,-0.5) J9(0.5,-0.5) J10(1.5,-0.5) J11(2.5,-0.5) J12(3.5,-0.5) J13(4.5,-0.5) J14(5.5,-0.5) J15(6.5,-0.5) J16(7.5,-0.5) K1(-7.5,-1.5) K2(-6.5,-1.5) K3(-5.5,-1.5) K4(-4.5,-1.5) K5(-3.5,-1.5) K6(-2.5,-1.5) K7(-1.5,-1.5) K8(-0.5,-1.5) K9(0.5,-1.5) K10(1.5,-1.5) K11(2.5,-1.5) K12(3.5,-1.5) K13(4.5,-1.5) K14(5.5,-1.5) K15(6.5,-1.5) K16(7.5,-1.5) L1(-7.5,-2.5) L2(-6.5,-2.5) L3(-5.5,-2.5) L4(-4.5,-2.5) L5(-3.5,-2.5) L6(-2.5,-2.5) L7(-1.5,-2.5) L8(-0.5,-2.5) L9(0.5,-2.5) L10(1.5,-2.5) L11(2.5,-2.5) L12(3.5,-2.5) L13(4.5,-2.5) L14(5.5,-2.5) L15(6.5,-2.5) L16(7.5,-2.5) M1(-7.5,-3.5) M2(-6.5,-3.5) M3(-5.5,-3.5) M4(-4.5,-3.5) M5(-3.5,-3.5) M6(-2.5,-3.5) M7(-1.5,-3.5) M8(-0.5,-3.5) M9(0.5,-3.5) M10(1.5,-3.5) M11(2.5,-3.5) M12(3.5,-3.5) M13(4.5,-3.5) M14(5.5,-3.5) M15(6.5,-3.5) M16(7.5,-3.5) N1(-7.5,-4.5) N2(-6.5,-4.5) N3(-5.5,-4.5) N4(-4.5,-4.5) N5(-3.5,-4.5) N6(-2.5,-4.5) N7(-1.5,-4.5) N8(-0.5,-4.5) N9(0.5,-4.5) N10(1.5,-4.5) N11(2.5,-4.5) N12(3.5,-4.5) N13(4.5,-4.5) N14(5.5,-4.5) N15(6.5,-4.5) N16(7.5,-4.5) P1(-7.5,-5.5) P2(-6.5,-5.5) P3(-5.5,-5.5) P4(-4.5,-5.5) P5(-3.5,-5.5) P6(-2.5,-5.5) P7(-1.5,-5.5) P8(-0.5,-5.5) P9(0.5,-5.5) P10(1.5,-5.5) P11(2.5,-5.5) P12(3.5,-5.5) P13(4.5,-5.5) P14(5.5,-5.5) P15(6.5,-5.5) P16(7.5,-5.5) R1(-7.5,-6.5) R2(-6.5,-6.5) R3(-5.5,-6.5) R4(-4.5,-6.5) R5(-3.5,-6.5) R6(-2.5,-6.5) R7(-1.5,-6.5) R8(-0.5,-6.5) R9(0.5,-6.5) R10(1.5,-6.5) R11(2.5,-6.5) R12(3.5,-6.5) R13(4.5,-6.5) R14(5.5,-6.5) R15(6.5,-6.5) R16(7.5,-6.5) T1(-7.5,-7.5) T2(-6.5,-7.5) T3(-5.5,-7.5) T4(-4.5,-7.5) T5(-3.5,-7.5) T6(-2.5,-7.5) T7(-1.5,-7.5) T8(-0.5,-7.5) T9(0.5,-7.5) T10(1.5,-7.5) T11(2.5,-7.5) T12(3.5,-7.5) T13(4.5,-7.5) T14(5.5,-7.5) T15(6.5,-7.5) T16(7.5,-7.5)
  silkscreen extent -9.27,-8.5 8.5,8.5, body extent -8.5,-8.5 8.5,8.5, height 1.55
GXHT30 [mm] "SON, 8-Leads, Body 2.50x2.50mm, Pitch 0.50mm, Thermal Pad 2.00x1.49mm, IPC Medium Density"
  rect 1x1.7 smd: 0(0,0)
  rect 0.55x0.25 smd: 1(-1.175,0.75) 2(-1.175,0.25) 3(-1.175,-0.25) 4(-1.175,-0.75) 5(1.175,-0.75) 6(1.175,-0.25) 7(1.175,0.25) 8(1.175,0.75)
  silkscreen extent -1.9,-1.45 1.45,1.5, body extent -1.3,-1.3 1.3,1.3, height 1
"LP5 - 1185" [mil]
  rect 354.33x393.7 smd: 0(330.94,-126.74)
  rect 140x30 smd: 1(-0.5,-0.5)
  oval 140x30 smd: 2(-0.5,-67.5) 3(-0.5,-134.5) 4(-0.5,-201.5) 5(-0.5,-268.5)
  silkscreen extent 150,-326 520,74
POWERPLUG1 [mil]
  round 80 hole 50: 1(0,0) 2(196.85,0)
  silkscreen extent -118,-200 315,200
QFN50P300X300X80_HS-17N [mm] "QFN, 16-Leads, Body 3.00x3.00mm, Pitch 0.50mm, Thermal Pad 1.68x1.68mm, IPC Medium Density"
  oval 0.5x0.25 smd: 1(-1.6,0.75) 2(-1.6,0.25) 3(-1.6,-0.25) 4(-1.6,-0.75) 9(1.6,-0.75) 10(1.6,-0.25) 11(1.6,0.25) 12(1.6,0.75)
  oval 0.25x0.5 smd: 5(-0.75,-1.6) 6(-0.25,-1.6) 7(0.25,-1.6) 8(0.75,-1.6) 13(0.75,1.6) 14(0.25,1.6) 15(-0.25,1.6) 16(-0.75,1.6)
  rect 1.68x1.68 smd: 17(0,0)
  silkscreen extent -2.47,-1.7 1.7,1.7, body extent -1.55,-1.55 1.55,1.55, height 0.8
R8(SOP127P600-8N) [mm]
  oval 2.2x0.6 smd: 1(-2.425,1.905) 2(-2.425,0.635) 3(-2.425,-0.635) 4(-2.425,-1.905) 5(2.425,-1.905) 6(2.425,-0.635) 7(2.425,0.635) 8(2.425,1.905)
  silkscreen extent -2.55,-2.5 0.93,2.88, body extent -2,-2.5 2,2.5, height 1.75
RJ45_shield [mm]
  round 3.25 hole 3.25: 0(-5.715,-8.89) 0(5.715,-8.89)
  round 1.524 hole 0.9: 1(4.445,0) 2(3.175,-2.54) 3(1.905,0) 4(0.635,-2.54) 5(-0.635,0) 6(-1.905,-2.54) 7(-3.175,0) 8(-4.445,-2.54)
  round 2.3 hole 1.75: 9(-7.75,-11.94) 10(7.75,-11.94)
  silkscreen extent -8,-16.69 8,1.71
SIP6 [mil]
  rect 50x50 hole 32: 1(0,0)
  round 50 hole 32: 2(100,0) 3(200,0) 4(300,0) 5(400,0) 6(500,0)
  silkscreen extent -50,-50 550,50
WLCSP-49 [mm] "BGA, 49-Leads, Body 3.96x3.96mmx0.65mm, Pitch 0.50mm"
  round 0.27 smd: A1(-1.5,1.5) A2(-1,1.5) A3(-0.5,1.5) A4(0,1.5) A5(0.5,1.5) A6(1,1.5) A7(1.5,1.5) B1(-1.5,1) B2(-1,1) B3(-0.5,1) B4(0,1) B5(0.5,1) B6(1,1) B7(1.5,1) C1(-1.5,0.5) C2(-1,0.5) C3(-0.5,0.5) C4(0,0.5) C5(0.5,0.5) C6(1,0.5) C7(1.5,0.5) D1(-1.5,0) D2(-1,0) D3(-0.5,0) D4(0,0) D5(0.5,0) D6(1,0) D7(1.5,0) E1(-1.5,-0.5) E2(-1,-0.5) E3(-0.5,-0.5) E4(0,-0.5) E5(0.5,-0.5) E6(1,-0.5) E7(1.5,-0.5) F1(-1.5,-1) F2(-1,-1) F3(-0.5,-1) F4(0,-1) F5(0.5,-1) F6(1,-1) F7(1.5,-1) G1(-1.5,-1.5) G2(-1,-1.5) G3(-0.5,-1.5) G4(0,-1.5) G5(0.5,-1.5) G6(1,-1.5) G7(1.5,-1.5)
  silkscreen extent -2.31,2.07 -2.07,2.32, body extent -1.98,-1.98 1.98,1.98, height 0.65

## Part data
C1 C2 C3 C4 C5 C6 C7 C8 C9 C10 C11 C12 C13 C14 C15 C16 C17 C18 C19 C20 C21 C22 C23 C24 C25 C26 C27 C28 C29 C30 C31 C32 C33 C34 C35 C36 C37 C38 C81 C82 C83 C84 C85 C86 C87 C88 C89 C90 C91 C92 C93 C94 C95 C96 C97 C98 C99 C100 C101 C102 C103: library part Cap, "Capacitor", LatestRevisionDate=17-Jul-2002, LatestRevisionNote="Re-released for DXP Platform.", PackageReference=RAD-0.3, Published=8-Jun-2000, Publisher="Altium Limited"
D1 D2 D3 D4 D5: "3 Amp Medium Power Silicon Rectifier Diode", ComponentLink1Description="Manufacturer Link", ComponentLink1URL=http://www.irf.com/, DatasheetVersion=Aug-1984, LatestRevisionDate=17-Jul-2002, LatestRevisionNote="Re-released for DXP Platform.", PackageDescription="Diode, Axial; Body 9.5 x 5.3 mm (LxDia. max), Lead Dia. 1.32 mm (max)", PackageReference=DO-201AD, Published=8-Jun-2000, Publisher="Altium Limited"
P1: library part FPGAJTAGHEADER
R1 R2 R3 R4 R5 R6 R7 R8 R9 R10 R11 R12 R13 R14 R15 R16 R17 R18 R19: library part Res, "Resistor", LatestRevisionDate=04-Mar-2005, LatestRevisionNote="PCB Footprint replaced.", PackageReference=J1-0603, Published=8-Jun-2000, Publisher="Altium Limited"
U1: "Spartan-6 LX 1.2V FPGA, 186 User I/Os, 256-Ball Fine-Pitch Thin BGA (1.0mm Pitch), Speed Grade 2, Commercial Grade, Pb-Free", Code_JEDEC=MS-034-AAF-1*, ComponentLink1Description="Manufacturer URL", ComponentLink1URL=http://www.xilinx.com/, ComponentLink2Description="Spartan-6 Datasheet", ComponentLink2URL=http://www.xilinx.com/support/documentation/data_sheets/ds160.pdf, ComponentLink3Description="Spartan-6 Documents", ComponentLink3URL=http://www.xilinx.com/support/documentation/spartan-6.htm, DatasheetVersion="ver1.6, Nov-2010", PackageDescription="256-Ball Fine Pitch Thin Ball Grid Array 1.00 mm Pitch (FTG256) - Pb-Free", PackageReference=FTG256, PackageVersion="ver1.3, Oct-2007"
U8: library part ADR4525BRZ
L1 L2: Code_IEC=1005, Code_JEITA=0402, LatestRevisionDate=17-Jul-2002, LatestRevisionNote="Re-released for DXP Platform.", PackageReference=0402-A, Published=8-Jun-2000, Publisher="Altium Limited"

## Free pads (board coordinates)
  round 4 hole 2.5: 0(28,28) 0(28,122) 0(198,28) 0(198,122)

## Via types
v1: diameter 0.305, hole 0.152, Top Layer to Bottom Layer, 454 vias
v2: diameter 1.27, hole 0.711, Top Layer to Bottom Layer, 47 vias
v3: diameter 0.254, hole 0.127, Top Layer to Bottom Layer, 23 vias

## Nets (pads, with @x,y where several pads share a name; then routed paths per layer and width w, separated by ;. In a path a pad name is that pad's centre, name@x,y a point inside that pad or via, vN(x,y) a via of type N, cw(c..) or ccw(c..) an arc to the next point about the centre after c; other vN are vias at no path point)
+1.2V: C17.2 C92.2 C93.2 C94.2 C95.2 C96.2 J4.21 J4.22 J4.23 J4.24 J5.21 J5.22 J5.23 J5.24 J6.21 J6.22 J6.23 J6.24 J7.21 J7.22 J7.23 J7.24 J8.21 J8.22 J8.23 J8.24 J9.21 J9.22 J9.23 J9.24 U1.G7 U1.G9 U1.H8 U1.H10 U1.J7 U1.J9 U1.K8 U1.K10 U5.11 U7.F1 U7.G1 U7.G2 | length 47.3
  Top Layer w0.152: U5.11@152.802,76.084 152.802,75.518 153.391,74.93 155.499,74.93 156.159,74.27 C17.2@156.159,73.101
  Top Layer w0.203: J4.21@29.225,82.5 30.328,82.5 v1(30.353,82.525) ; J4.22@29.225,83 29.243,82.982 v1(30.353,82.982) ; J4.23@29.225,83.5 30.292,83.5 v1(30.353,83.439) ; J4.24@29.225,84 30.351,84 v1(30.353,83.998) ; J5.21@49.225,82.5 50.318,82.5 v1(50.343,82.525) ; J5.22@49.225,83 50.325,83 v1(50.343,82.982) ; J5.23@49.225,83.5 50.328,83.5 v1(50.343,83.515) ; J5.24@49.225,84 v1(50.343,84) ; J6.21@69.225,82.5 69.251,82.474 v1(70.333,82.474) ; J6.22@69.225,83 70.325,83 v1(70.333,83.007) ; J6.23@69.225,83.5 70.322,83.5 v1(70.333,83.49) ; J6.24@69.225,84 70.33,84 v1(70.333,83.998) ; J7.21@89.225,82.5 90.323,82.5 v1(90.348,82.525) ; J7.22@89.225,83 90.341,83 v1(90.348,83.007) ; J7.23@89.225,83.5 v1(90.348,83.5) ; J7.24@89.225,84 90.325,84 v1(90.348,84.023) ; J8.21@109.225,82.5 v1(110.338,82.5) ; J8.22@109.225,83 110.33,83 v1(110.338,83.007) ; J8.23@109.225,83.5 v1(110.338,83.5) ; J8.24@109.225,84 110.31,84 v1(110.338,83.972) ; J9.21@129.225,82.5 v1(130.353,82.499) ; J9.22@129.225,83 v1(130.353,83) ; J9.23@129.225,83.5 v1(130.353,83.5) ; J9.24@129.225,84 130.351,84 v1(130.353,83.998) ; v1(154.887,92.271) 154.887,92.291 U1.K10@155.37,92.774 ; U1.K8@155.37,94.774 155.37,94.771 v1(155.878,94.263) 155.881,94.263 U1.J9@156.37,93.774 ; v1(155.878,96.27) 155.878,96.266 U1.J7@156.37,95.774 ; v1(156.868,95.268) 157.362,94.774 U1.H8@157.37,94.774 ; U1.H10@157.37,92.774 157.407,92.774 v1(157.91,92.271) ; v1(157.884,94.263) 157.884,94.259 U1.G9@158.37,93.774 ; U1.G7@158.37,95.774 158.85,96.254 v1(158.85,96.284)
  Top Layer w0.254: U7.G2@156.159,69.215 156.159,69.266 v1(156.591,69.698) ; U7.F1@157.429,70.485 v1(157.429,71.095)
  Top Layer w0.406: U7.G1@156.159,70.485 v1(156.159,71.095) C17.2@156.159,73.101
  Bottom Layer w0.406: v1(154.887,92.271) 155.355,92.271 C96.2@155.598,92.027 ; v1(155.878,96.27) 155.878,96.732 C94.2@156.098,96.952 ; v1(156.868,95.268) 157.615,95.268 C95.2@157.615,95.039 ; C92.2@157.734,97.587 157.734,97.4 v1(158.85,96.284) ; v1(157.884,94.263) 157.884,93.759 C93.2@158.077,93.566
+2.5Vref: C35.2 C36.2 U2.F2 U8.6 | length 12.8
  Top Layer w0.152: v3(80.035,53.518) 80.28,53.273 U2.F2@80.288,53.273
  Top Layer w0.508: v1(74.004,49.428) C36.2@74.004,48.59 74.219,48.375 U8.6@74.219,44.843
  Signal Layer 2 w0.254: v1(74.004,49.428) 78.093,53.518 v3(80.035,53.518)
+3.3V: C15.2 C19.1 C29.1 C81.2 C82.2 C83.2 C84.2 C85.2 C86.2 C87.2 C88.2 C89.2 C90.2 C91.2 C97.2 C98.2 C99.2 C100.2 C101.2 C102.2 C103.2 J4.27 J4.28 J4.29 J4.30 J5.27 J5.28 J5.29 J5.30 J6.27 J6.28 J6.29 J6.30 J7.27 J7.28 J7.29 J7.30 J8.27 J8.28 J8.29 J8.30 J9.27 J9.28 J9.29 J9.30 L2.2 P1.1 R12.1 R13.1 R16.2 U1.B4 U1.B9 U1.B13 U1.D2 U1.D7 U1.D10 U1.D15 U1.E5 U1.F8 U1.F11 U1.G4 U1.G10 U1.G13 U1.H6 U1.J2 U1.J10 U1.J15 U1.K4 U1.K13 U1.L6 U1.L9 U1.N2 U1.N7 U1.N10 U1.N15 U1.R4 U1.R8 U1.R13 U2.C6 U5.16 U6.5 U7.A1 U7.A2 U7.A3 | length 76.8
  Top Layer w0.152: v1@157.861,78.192 157.879,78.175 U6.5@159.219,78.175
  Top Layer w0.203: J4.27@29.225,85.5 30.324,85.5 v1(30.353,85.471) ; J4.28@29.225,86 v1(30.353,86) ; J4.29@29.225,86.5 30.34,86.5 v1(30.353,86.487) ; J4.30@29.225,87 v1(30.353,87) ; J5.27@49.225,85.5 50.314,85.5 v1(50.343,85.471) ; J5.28@49.225,86 v1(50.343,86) ; J5.29@49.225,86.5 50.33,86.5 v1(50.343,86.512) ; J5.30@49.225,87 50.338,87 v1(50.343,86.995) ; J6.27@69.225,85.5 70.311,85.5 v1(70.333,85.522) ; J6.28@69.225,86 70.328,86 v1(70.333,86.004) ; J6.29@69.225,86.5 70.32,86.5 v1(70.333,86.512) ; J6.30@69.225,87 v1(70.333,87) ; v3(81.534,51.511) 81.772,51.273 U2.C6@81.788,51.273 ; J7.27@89.225,85.5 v1(90.348,85.5) ; J7.28@89.225,86 90.327,86 v1(90.348,85.979) ; J7.29@89.225,86.5 90.335,86.5 v1(90.348,86.487) ; J7.30@89.225,87 v1(90.348,87) ; J8.27@109.225,85.5 v1(110.338,85.5) ; J8.28@109.225,86 110.333,86 v1(110.338,86.004) ; J8.29@109.225,86.5 v1(110.338,86.5) ; J8.30@109.225,87 v1(110.338,87) ; J9.27@129.225,85.5 v1(130.327,85.5) ; J9.28@129.225,86 v1(130.353,86) ; J9.29@129.225,86.5 v1(130.353,86.5) ; J9.30@129.225,87 v1(130.353,87) ; v1(149.871,89.274) 149.871,89.275 U1.R13@150.37,89.774 ; U1.R8@150.363,94.774 U1.R8@150.37,94.774 150.873,94.271 v1(150.873,94.259) ; U1.R4@150.37,98.774 150.873,98.271 v1(150.873,98.265) ; v1(151.865,87.278) 151.874,87.278 U1.N15@152.37,87.774 ; v1(151.865,93.261) 152.352,92.774 U1.N10@152.37,92.774 ; v1(151.865,96.27) 151.874,96.27 U1.N7@152.37,95.774 ; v1(151.874,100.282) 151.878,100.282 U1.N2@152.37,100.774 U1.N2@152.379,100.774 ; v1(153.871,97.275) 153.871,97.273 U1.L6@154.37,96.774 ; U5.16@154.152,78.434 154.152,78.935 v1(154.305,79.087) 154.629,79.412 R16.2@155.016,79.412 C29.1@155.481,79.412 ; U1.L9@154.308,93.774 U1.L9@154.37,93.774 154.398,93.774 v1(154.887,94.263) ; v1(154.862,98.265) U1.K4@155.37,98.774 ; U1.K13@155.37,89.774 155.377,89.774 v1(155.878,89.274) ; v1(155.878,87.267) 155.878,87.282 U1.J15@156.37,87.774 ; v1(155.878,100.272) 155.878,100.282 U1.J2@156.37,100.774 ; U1.J10@156.37,92.774 156.37,92.769 v1(156.868,92.271) ; U1.H6@157.37,96.774 157.37,96.734 v1(157.834,96.27) ; U1.G13@158.37,89.774 158.87,89.274 v1(158.875,89.274) ; U1.G10@158.37,92.774 158.372,92.774 v1(158.875,92.271) ; U1.G4@158.37,98.774 158.37,98.776 v1(158.875,99.281) ; U1.F11@159.37,91.774 159.373,91.774 v1(159.868,92.269) ; U1.F8@159.37,94.774 159.864,94.28 v1(159.864,94.263) ; v1(159.864,98.265) 159.879,98.265 U1.E5@160.37,97.774 ; U1.D15@161.37,87.774 161.866,87.278 v1(161.872,87.278) ; U1.D10@161.37,92.774 161.385,92.774 v1(161.872,93.261) ; U1.D7@161.37,95.774 161.376,95.774 v1(161.872,96.27) ; U1.D2@161.371,100.774 v1(161.872,101.275) ; v1@162.869,89.274 U1.B13@163.37,89.774 ; v1(162.869,93.261) 163.37,93.762 U1.B9@163.37,93.774 U1.B9@163.37,93.794 ; v1(162.869,98.276) 162.872,98.276 U1.B4@163.37,98.774
  Top Layer w0.254: U7.A3@163.779,67.945 v1(164.414,67.945) ; U7.A2@163.779,69.215 v1(164.414,69.215) ; U7.A1@163.779,70.485 v1(163.779,71.145) 163.779,72.669 C15.2@164.211,73.101
  Top Layer w0.406: v1@157.861,78.192 R12.1@157.861,79.208 ; v1(162.124,78.175) R13.1@162.124,79.252
  Top Layer w0.508: L2.2@83.134,60.849 v1(84.125,60.849)
  Bottom Layer w0.406: C85.2@149.885,94.437 150.063,94.259 v1(150.873,94.259) ; C98.2@150.19,98.664 150.589,98.265 v1(150.873,98.265) ; v1(151.865,96.27) 151.865,96.904 C99.2@151.981,97.021 ; v1(151.874,100.282) 151.874,100.922 C97.2@152.095,101.143 ; C90.2@153.695,98.054 153.871,97.879 v1(153.871,97.275) ; v1(154.862,98.265) 154.862,98.966 C87.2@154.872,98.976 ; v1(154.887,94.263) 154.887,94.715 C89.2@155.143,94.971 ; C83.2@155.537,86.556 155.878,86.896 v1(155.878,87.267) ; v1(157.85,78.181) 159.246,78.181 C19.1@159.315,78.251 ; C82.2@158.164,89.339 158.23,89.274 v1(158.875,89.274) ; v1(158.875,92.271) 158.875,91.671 C88.2@159.36,91.186 159.868,91.694 v1(159.868,92.269) ; v1(158.875,99.281) C103.2@159.726,99.281 ; C91.2@159.864,97.424 v1(159.864,98.265) ; C86.2@161.024,101.286 161.034,101.275 v1(161.872,101.275) ; C81.2@161.034,86.353 161.872,87.191 v1(161.872,87.278) ; v1(162.868,89.274) 163.462,89.274 C102.2@163.551,89.362 ; v1(162.869,93.261) 163.241,93.261 C101.2@163.574,92.928 ; v1(162.869,98.276) 163.487,98.276 C100.2@163.872,97.892
  Bottom Layer w0.508: v1(149.871,89.274) C84.2@150.607,89.274
+7.5V: C4.2 C5.2 C6.2 D5.2 R4.2 R17.1 R19.1 | length 95.8
  Top Layer w0.508: v1(79.731,60.111) R17.1@80.569,60.111
  Top Layer w0.762: R19.1@72.81,32.881 87.503,32.881 R4.2@88.558,31.826 88.558,30.466 89.484,29.54 101.473,29.54 104.227,32.294 C6.2@104.227,35.89 ; C4.2@104.227,47.168 C5.2@104.227,41.529 C6.2@104.227,35.89 ; D5.2@109.652,35.868 104.249,35.868 C6.2@104.227,35.89
  Signal Layer 2 w0.762: v1(79.731,60.111) 80.735,59.106 86.414,59.106 D5.2@109.652,35.868
+12V: C21.2 C22.2 C23.2 D1.1 L1.1 R5.1 U7.B3 U7.B4 U7.B5 U7.C6 U7.E3 U7.E4 U7.E5 U7.F6 U7.H3 U7.H4 U7.H5 U7.J6 U7.K7 U7.L3 U7.L4 U7.L5 | length 35.1
  Top Layer w0.254: v1(150.419,65.405) U7.L5@151.079,65.405 ; v1(150.419,66.675) U7.L4@151.079,66.675 ; v1(150.647,67.437) 151.079,67.869 U7.L3@151.079,67.945 ; v1(152.349,62.205) U7.K7@152.349,62.865 ; v1(153.162,63.678) U7.J6@153.619,64.135 ; v1(154.432,67.513) 154.457,67.513 U7.H3@154.889,67.945 ; U7.H5@154.889,65.405 154.94,65.405 v1(155.372,64.973) ; U7.H4@154.889,66.675 154.889,66.65 v1(155.346,66.192) ; U7.F6@157.429,64.135 157.886,63.678 v1(157.912,63.678) ; U7.E5@158.699,65.354 U7.E5@158.699,65.405 158.699,65.608 v1(159.131,66.04) 158.699,66.472 U7.E4@158.699,66.675 ; U7.E3@158.699,67.945 158.75,67.945 v1(159.233,67.462) ; v1(160.782,64.567) 160.807,64.567 U7.C6@161.239,64.135 ; v1(162.001,67.539) 162.103,67.539 U7.B3@162.509,67.945 ; U7.B5@162.509,65.405 162.509,65.366 v1(162.941,64.934) ; U7.B4@162.509,66.675 162.509,66.624 v1(162.941,66.192)
  Top Layer w2.032: D1.1@136.068,54.708 136.082,54.722 C21.2@144.018,54.722 144.083,54.657 L1.1@159.385,54.657
  Bottom Layer w0.254: R5.1@159.222,68.174 159.233,68.163 v1(159.233,67.462)
+12Vin: C24.2 C25.2 C26.2 L1.2 P9.1 | length 27.9
  Top Layer w2.032: L1.2@167.005,54.657 194.691,54.657 P9.1@194.818,54.784
-5.2V: C9.1 C10.1 J4.9 J4.10 J5.9 J5.10 J6.9 J6.10 J7.9 J7.10 J8.9 J8.10 J9.9 J9.10 R3.1 R6.1 U4.4 | length 311.1
  Top Layer w0.203: J4.9@29.225,76.5 30.332,76.5 v1(30.353,76.479) ; J4.10@29.225,77 30.34,77 v1(30.353,76.987) ; J5.9@49.225,76.5 v1(50.343,76.5) ; J5.10@49.225,77 v1(50.343,77) ; J6.9@69.225,76.5 70.312,76.5 v1(70.333,76.479) ; J6.10@69.225,77 70.32,77 v1(70.333,76.987) ; J7.9@89.225,76.5 90.343,76.5 v1(90.348,76.505) ; J7.10@89.225,77 v1(90.348,77) ; J8.9@109.225,76.5 110.333,76.5 v1(110.338,76.505) ; J8.10@109.225,77 110.325,77 v1(110.338,76.987) ; J9.9@129.225,76.5 v1(130.353,76.5) ; J9.10@129.225,77 v1(130.353,77)
  Top Layer w0.762: C10.1@32.385,39.863 32.395,39.853 v2(45.187,39.853) 46.298,38.741 U4.4@48.985,38.741 ; C9.1@38.227,39.863 C9.1@39.446,39.863 ; R6.1@92.278,44.716 v1(92.278,45.618)
  Top Layer w1.27: C9.1@39.446,39.863 C9.1@39.471,39.888
  Signal Layer 2 w0.762: v2(45.187,39.853) 52.095,32.944 82.525,32.944 92.278,42.697 v1(92.278,45.618)
  Signal Layer 2 w0.965: 30.353,76.733 45.187,76.733 50.343,76.733 ; 62.205,76.733 70.333,76.733 ; 82.931,76.733 90.348,76.733 ; 103.53,76.733 110.338,76.733 ; 124.562,76.733 130.378,76.733
  Signal Layer 2 w1.524: v2(45.187,39.853) 45.187,62.459 ; 45.187,76.733 45.187,62.459 ; 62.205,76.733 62.205,62.459 ; 82.931,76.733 82.906,76.708 82.906,62.459 ; 103.53,76.733 103.556,76.708 103.556,62.459 ; 124.562,76.733 124.562,62.459 103.556,62.459 ; 45.187,62.459 62.205,62.459 ; 62.205,62.459 82.906,62.459 ; 82.906,62.459 103.556,62.459
-7V: C1.2 C2.2 C3.2 C8.2 J4.3 J4.4 J4.5 J4.6 J5.3 J5.4 J5.5 J5.6 J6.3 J6.4 J6.5 J6.6 J7.3 J7.4 J7.5 J7.6 J8.3 J8.4 J8.5 J8.6 J9.3 J9.4 J9.5 J9.6 P8.1 R14.1 R15.1 U4.0 U4.3 | length 67.7
  Top Layer w0.203: J4.3@29.225,73.5 30.335,73.5 v1(30.353,73.482) ; J4.4@29.225,74 v1(30.353,74) ; J4.5@29.225,74.5 30.326,74.5 v1(30.353,74.473) ; J4.6@29.225,75 30.334,75 v1(30.353,74.981) ; J5.3@49.225,73.5 50.325,73.5 v1(50.343,73.482) ; J5.4@49.225,74 v1(50.343,74) ; J5.5@49.225,74.5 50.319,74.5 v1(50.343,74.524) ; J5.6@49.225,75 v1(50.343,75) ; J6.3@69.225,73.5 v1(70.333,73.5) ; J6.4@69.225,74 69.235,73.99 v1(70.333,73.99) ; J6.5@69.225,74.5 v1(70.333,74.5) ; J6.6@69.225,75 v1(70.333,75) ; J7.3@89.225,73.5 v1(90.348,73.5) ; J7.4@89.225,74 v1(90.348,74) ; J7.5@89.225,74.5 90.299,74.5 v1(90.348,74.549) ; J7.6@89.225,75 90.329,75 v1(90.348,74.981) ; J8.3@109.225,73.5 v1(110.312,73.5) ; J8.4@109.225,74 v1(110.338,74) ; J8.5@109.225,74.5 110.336,74.5 v1(110.338,74.498) ; J8.6@109.225,75 110.318,75 v1(110.338,74.981) ; J9.3@129.225,73.5 v1(130.353,73.5) ; J9.4@129.225,74 v1(130.353,74) ; J9.5@129.225,74.5 130.351,74.5 v1(130.353,74.498) ; J9.6@129.225,75 v1(130.353,75)
  Top Layer w0.762: U4.3@48.985,40.443 57.207,40.443 U4.0@57.404,40.64 ; R15.1@81.416,41.365 v1(82.271,41.365) ; v1(84.887,43.813) R14.1@85.725,43.813
  Top Layer w1.524: C8.2@166.649,39.243 168.235,37.658 C3.2@170.84,37.658 170.88,37.697 P8.1@194.818,37.697
  Top Layer w2.032: U4.0@57.404,40.64 U4.0@58.659,39.385
  other v2: 60.782,37.039 53.924,37.16 56.083,37.211 58.217,37.236 53.95,39.599 58.141,39.599 60.655,39.599 55.982,39.649 53.924,42.367 55.982,42.367 58.166,42.367 60.452,42.367 53.924,44.628 55.982,44.628 58.166,44.628 60.427,44.628
ADDR_LVCMOS33: U1.F16 U6.2 | length 6.6
  Top Layer w0.102: U1.F16@159.37,86.774 159.37,83.175 160.219,82.325 U6.2@160.219,80.525
ALERT_LVCMOS33: U1.F15 U6.3 | length 7.8
  Top Layer w0.102: U1.F15@159.37,87.774 158.87,87.274 158.87,82.938 159.719,82.089 U6.3@159.719,80.525
CLK1_LVDS33_N: J4.43 U1.C6 | length 160.4
  Top Layer w0.203: J4.43@29.225,93.5 30.35,93.5 v1(30.353,93.497) ; v1(161.872,97.275) 162.37,96.777 U1.C6@162.37,96.774
  Signal Layer 1 w0.102: v1(30.353,93.497) 30.455,93.396 37.974,93.396 57.125,112.547 157.886,112.547 167.208,103.225 167.208,99.67 165.15,97.612 162.21,97.612 v1(161.872,97.275)
CLK1_LVDS33_P: J4.42 U1.D6 | length 160.5
  Top Layer w0.203: J4.42@29.225,93 v1(30.353,93) ; v1(160.872,97.275) 160.872,97.272 U1.D6@161.37,96.774
  Signal Layer 1 w0.102: v1(30.353,93) 30.444,93.091 38.1,93.091 57.252,112.243 157.759,112.243 166.903,103.099 166.903,99.797 165.024,97.917 161.515,97.917 v1(160.872,97.275)
CLK2_LVDS33_N: J5.43 U1.M6 | length 115.8
  Top Layer w0.203: J5.43@49.225,93.5 v1(50.343,93.5) ; U1.M6@153.37,96.774 153.37,96.771 v1(153.871,96.27)
  Signal Layer 1 w0.102: v1(50.343,93.5) 50.446,93.397 56.542,93.397 70.536,107.391 134.645,107.391 145.109,96.926 152.781,96.926 153.438,96.27 v1(153.871,96.27)
CLK2_LVDS33_P: J5.42 U1.N6 | length 114.7
  Top Layer w0.203: J5.42@49.225,93 50.332,93 v1(50.343,92.989) ; U1.N6@152.37,96.774 152.874,96.27 v1(152.881,96.27)
  Signal Layer 1 w0.102: v1(50.343,92.989) 50.446,93.092 56.668,93.092 70.662,107.086 134.518,107.086 144.983,96.622 152.529,96.622 v1(152.881,96.27)
CLK3_LVDS33_N: J6.43 U1.N11 | length 84.9
  Top Layer w0.203: J6.43@69.225,93.5 v1(70.333,93.5) ; U1.N11@152.37,91.774 152.384,91.774 v1(152.881,92.271)
  Signal Layer 1 w0.102: v1(70.333,93.5) 70.43,93.402 137,93.402 137.464,92.939 151.765,92.939 152.433,92.271 v1(152.881,92.271)
CLK3_LVDS33_P: J6.42 U1.P11 | length 83.7
  Top Layer w0.203: J6.42@69.225,93 v1(70.333,93) ; U1.P11@151.37,91.774 151.865,92.269 v1(151.865,92.271)
  Signal Layer 1 w0.102: v1(70.333,93) 70.43,93.098 136.874,93.098 137.338,92.634 151.502,92.634 v1(151.865,92.271)
CLK4_LVDS33_N: J7.43 U1.A4 | length 92.1
  Top Layer w0.102: J7.43@89.225,93.5 90.051,93.5 90.155,93.396 92.325,93.396 92.859,93.929 97.939,93.929 114.728,110.719 157.865,110.719 166.091,102.493 166.091,100.174 164.9,98.984 164.58,98.984 U1.A4@164.37,98.774
CLK4_LVDS33_P: J7.42 U1.C4 | length 93.4
  Top Layer w0.102: J7.42@89.225,93 90.051,93 90.193,93.142 92.431,93.142 92.964,93.675 98.044,93.675 114.833,110.465 157.759,110.465 165.837,102.387 165.837,100.279 164.795,99.238 163.109,99.238 162.646,98.774 U1.C4@162.37,98.774
CLK5_LVDS33_N: J8.43 U1.P6 | length 53.9
  Top Layer w0.102: J8.43@109.225,93.5 110.051,93.5 110.155,93.396 112.442,93.396 113.026,93.98 116.582,93.98 129.409,106.807 134.42,106.807 138.532,102.696 138.532,99.339 140.64,97.231 150.637,97.231 151.094,96.774 U1.P6@151.37,96.774
CLK5_LVDS33_P: J8.42 U1.T6 | length 51.8
  Top Layer w0.102: J8.42@109.225,93 110.051,93 110.193,93.142 112.547,93.142 113.132,93.726 116.688,93.726 129.515,106.553 134.315,106.553 138.278,102.591 138.278,99.234 140.535,96.977 148.891,96.977 149.094,96.774 U1.T6@149.37,96.774
CLK6_LVDS33_N: J9.43 U1.P10 | length 22.9
  Top Layer w0.102: J9.43@129.225,93.5 130.051,93.5 130.18,93.37 132.356,93.37 132.94,93.955 136.401,93.955 137.137,93.218 150.65,93.218 151.094,92.774 U1.P10@151.37,92.774
CLK6_LVDS33_P: J9.42 U1.T10 | length 20.8
  Top Layer w0.102: J9.42@129.225,93 130.051,93 130.167,93.116 132.461,93.116 133.045,93.701 136.295,93.701 137.032,92.964 148.904,92.964 149.094,92.774 U1.T10@149.37,92.774
CLK_LVDS33_N: J2.2 U1.E8 | length 35
  Top Layer w0.203: U1.E8@160.37,94.774 160.378,94.774 v1(160.872,95.268)
  Signal Layer 2 w0.102: v1(160.872,95.268) 161.235,95.631 166.445,95.631 182.092,111.277 188.239,111.277 J2.2@188.417,111.1
CLK_LVDS33_P: J2.1 U1.E7 | length 33.8
  Top Layer w0.203: v1(159.864,95.268) U1.E7@160.37,95.774
  Signal Layer 2 w0.102: v1(159.864,95.268) 160.317,95.268 160.985,95.936 166.319,95.936 181.966,111.582 185.09,111.582 J2.1@185.877,112.37
DAC_#RESET_LVCMOS33: U1.R16 U2.B7 | length 91
  Top Layer w0.102: U2.B7@82.288,50.773 82.288,50.173 82.652,49.809 91.262,49.809 102.946,61.493 136.754,61.493 142.418,67.158 142.418,76.632 150.37,84.584 U1.R16@150.37,86.774
DAC_#SYNC_LVCMOS33: U1.L16 U2.F7 | length 100
  Top Layer w0.102: U2.F7@80.288,50.773 80.288,49.176 81.712,47.752 93.269,47.752 103.734,58.217 138.786,58.217 145.821,65.253 145.821,75.26 154.37,83.809 U1.L16@154.37,86.774
DAC_SCLK_LVCMOS33: U1.M16 U2.E7 | length 97.9
  Top Layer w0.102: U2.E7@80.788,50.773 80.67,50.656 80.67,49.53 81.915,48.285 92.786,48.285 103.581,59.08 138.408,59.08 145.009,65.681 145.009,75.616 153.37,83.977 U1.M16@153.37,86.774
DAC_SDI_LVCMOS33: U1.P16 U2.C7 | length 93.3
  Top Layer w0.102: U2.C7@81.788,50.773 81.788,49.911 82.423,49.276 91.77,49.276 103.175,60.681 137.338,60.681 143.307,66.65 143.307,76.276 151.37,84.339 U1.P16@151.37,86.774
DAC_SDO_LVCMOS33: U1.N16 U2.E6 | length 96.3
  Top Layer w0.102: U2.E6@80.788,51.273 81.026,51.035 81.026,49.911 82.144,48.793 92.304,48.793 103.403,59.893 137.897,59.893 144.17,66.167 144.17,75.954 152.37,84.154 U1.N16@152.37,86.774
DATA1_LVDS33_N: J4.49 U1.D9 | length 172.4
  Top Layer w0.203: J4.49@29.225,96.5 30.348,96.5 v1(30.353,96.495) ; v1(160.872,93.269) 161.37,93.766 U1.D9@161.37,93.774
  Signal Layer 1 w0.102: v1(30.353,96.495) 30.429,96.418 36.018,96.418 56.262,116.662 158.14,116.662 169.951,104.85 169.951,98.4 165.175,93.624 161.228,93.624 v1(160.872,93.269)
DATA1_LVDS33_P: J4.48 U1.F9 | length 172.5
  Top Layer w0.203: J4.48@29.225,96 v1(30.353,96) ; U1.F9@159.37,93.774 159.37,93.763 v1(159.864,93.269)
  Signal Layer 1 w0.102: v1(30.353,96) 30.467,96.114 36.144,96.114 56.388,116.357 158.013,116.357 169.647,104.724 169.647,98.527 165.049,93.929 160.524,93.929 v1(159.864,93.269)
DATA2_LVDS33_N: J5.49 U1.C5 | length 134.4
  Top Layer w0.203: J5.49@49.225,96.5 50.337,96.5 v1(50.343,96.495) ; v1(161.866,98.265) 161.879,98.265 U1.C5@162.37,97.774
  Signal Layer 1 w0.102: v1(50.343,96.495) 50.438,96.4 55.151,96.4 69.495,110.744 157.886,110.744 166.116,102.514 166.116,100.153 164.591,98.628 162.229,98.628 v1(161.866,98.265)
DATA2_LVDS33_P: J5.48 U1.D5 | length 134.5
  Top Layer w0.203: J5.48@49.225,96 v1(50.343,96) ; v1(160.872,98.265) 161.363,97.774 U1.D5@161.37,97.774
  Signal Layer 1 w0.102: v1(50.343,96) 50.438,96.095 55.277,96.095 69.621,110.439 157.759,110.439 165.811,102.387 165.811,100.279 164.465,98.933 161.976,98.933 161.308,98.265 v1(160.872,98.265)
DATA3_LVDS33_N: J6.49 U1.N9 | length 85.3
  Top Layer w0.102: v1@70.327,96.5 v1(70.333,96.495)
  Top Layer w0.203: J6.49@69.225,96.5 v1@70.327,96.5 ; U1.N9@152.37,93.774 152.397,93.774 v1(152.883,94.259)
  Signal Layer 1 w0.102: v1(70.333,96.495) 70.427,96.4 137.711,96.4 139.191,94.92 151.816,94.92 152.476,94.259 v1(152.883,94.259)
DATA3_LVDS33_P: J6.48 U1.P9 | length 84.1
  Top Layer w0.203: J6.48@69.225,96 v1(70.333,96) ; U1.P9@151.37,93.774 151.379,93.774 v1(151.865,94.259)
  Signal Layer 1 w0.102: v1(70.333,96) 70.427,96.095 137.585,96.095 139.065,94.615 151.509,94.615 v1(151.865,94.259)
DATA4_LVDS33_N: J7.49 U1.A6 | length 99.7
  Top Layer w0.102: J7.49@89.225,96.5 90.051,96.5 90.158,96.393 97.732,96.393 114.115,112.776 159.643,112.776 168.478,103.94 168.478,99.031 166.45,97.003 164.874,97.003 164.646,96.774 U1.A6@164.37,96.774
DATA4_LVDS33_P: J7.48 U1.B6 | length 100
  Top Layer w0.102: J7.48@89.225,96 90.051,96 90.19,96.139 97.837,96.139 114.22,112.522 159.537,112.522 168.224,103.835 168.224,99.136 166.345,97.257 164.128,97.257 163.646,96.774 U1.B6@163.37,96.774
DATA5_LVDS33_N: J8.49 U1.P4 | length 52.9
  Top Layer w0.102: J8.49@109.225,96.5 110.051,96.5 110.158,96.393 115.897,96.393 128.317,108.814 135.233,108.814 140.995,103.051 140.995,100.584 142.342,99.238 150.63,99.238 151.094,98.774 U1.P4@151.37,98.774
DATA5_LVDS33_P: J8.48 U1.T4 | length 50.8
  Top Layer w0.102: J8.48@109.225,96 110.051,96 110.19,96.139 116.002,96.139 128.422,108.56 135.128,108.56 140.741,102.946 140.741,100.479 142.236,98.984 148.884,98.984 149.094,98.774 U1.T4@149.37,98.774
DATA6_LVDS33_N: J9.49 U1.P8 | length 22.9
  Top Layer w0.102: J9.49@129.225,96.5 130.051,96.5 130.158,96.393 132.049,96.393 132.583,95.86 138.201,95.86 138.862,95.199 150.669,95.199 151.094,94.774 U1.P8@151.37,94.774
DATA6_LVDS33_P: J9.48 U1.T8 | length 20.8
  Top Layer w0.102: J9.48@129.225,96 130.051,96 130.19,96.139 131.944,96.139 132.478,95.606 138.096,95.606 138.757,94.945 148.923,94.945 149.094,94.774 U1.T8@149.37,94.774
DATA_LVDS33_N: J2.6 U1.A7 | length 28.4
  Top Layer w0.102: U1.A7@164.37,95.774 164.646,95.774 164.833,95.961 169.316,95.961 179.476,106.121 188.316,106.121 J2.6@188.417,106.02
DATA_LVDS33_P: J2.5 U1.C7 | length 28.3
  Top Layer w0.102: U1.C7@162.37,95.774 162.646,95.774 163.087,96.215 169.211,96.215 179.371,106.375 185.166,106.375 J2.5@185.952,107.161
FB1_LVDS33_N: J4.46 U1.C8 | length 166.1
  Top Layer w0.203: J4.46@29.225,95 30.349,95 v1(30.353,94.996) ; v1(161.866,94.263) 162.37,94.767 U1.C8@162.37,94.774
  Signal Layer 1 w0.102: v1(30.353,94.996) 30.442,94.907 37.123,94.907 56.744,114.529 157.923,114.529 168.504,103.948 168.504,99.01 164.107,94.613 162.216,94.613 v1(161.866,94.263)
FB1_LVDS33_P: J4.45 U1.D8 | length 165.1
  Top Layer w0.203: J4.45@29.225,94.5 30.34,94.5 v1(30.353,94.513) ; U1.D8@161.37,94.774 161.372,94.774 v1(161.866,95.268)
  Signal Layer 1 w0.102: v1(30.353,94.513) 30.442,94.602 37.249,94.602 56.871,114.224 157.797,114.224 168.199,103.822 168.199,99.136 163.981,94.918 162.216,94.918 v1(161.866,95.268)
FB2_LVDS33_N: J5.46 U1.N5 | length 114.7
  Top Layer w0.203: J5.46@49.225,95 49.229,94.996 v1(50.343,94.996) ; U1.N5@152.37,97.774 152.389,97.774 v1(152.881,98.265)
  Signal Layer 1 w0.102: v1(50.343,94.996) 50.432,94.907 55.867,94.907 69.926,108.966 135.432,108.966 145.465,98.933 151.765,98.933 152.433,98.265 v1(152.881,98.265)
FB2_LVDS33_P: J5.45 U1.P5 | length 113.5
  Top Layer w0.203: J5.45@49.225,94.5 50.329,94.5 v1(50.343,94.513) ; U1.P5@151.37,97.774 151.861,98.265 v1(151.867,98.265)
  Signal Layer 1 w0.102: v1(50.343,94.513) 50.432,94.602 55.994,94.602 70.052,108.661 135.306,108.661 145.339,98.628 151.504,98.628 v1(151.867,98.265)
FB3_LVDS33_N: J6.46 U1.L10 | length 86.1
  Top Layer w0.203: J6.46@69.225,95 70.329,95 v1(70.333,94.996) ; v1(153.873,93.261) 153.882,93.261 U1.L10@154.37,92.774
  Signal Layer 1 w0.102: v1(70.333,94.996) 70.434,94.894 137.21,94.894 138.175,93.929 152.806,93.929 153.474,93.261 v1(153.873,93.261)
FB3_LVDS33_P: J6.45 U1.M10 | length 84.9
  Top Layer w0.203: J6.45@69.225,94.5 70.321,94.5 v1(70.333,94.488) ; v1(152.883,93.261) U1.M10@153.37,92.774
  Signal Layer 1 w0.102: v1(70.333,94.488) 70.434,94.59 137.084,94.59 138.049,93.624 152.52,93.624 v1(152.883,93.261)
FB4_LVDS33_N: J7.46 U1.A5 | length 95.7
  Top Layer w0.102: J7.46@89.225,95 90.051,95 90.182,94.869 97.558,94.869 114.423,111.735 158.652,111.735 167.183,103.204 167.183,99.691 165.485,97.993 164.865,97.993 164.646,97.774 U1.A5@164.37,97.774
FB4_LVDS33_P: J7.45 U1.B5 | length 95.9
  Top Layer w0.102: J7.45@89.225,94.5 90.051,94.5 90.166,94.615 97.663,94.615 114.529,111.481 158.547,111.481 166.929,103.099 166.929,99.797 165.379,98.247 164.119,98.247 163.646,97.774 U1.B5@163.37,97.774
FB5_LVDS33_N: J8.46 U1.R5 | length 52.4
  Top Layer w0.102: J8.46@109.225,95 110.051,95 110.156,94.894 115.871,94.894 128.825,107.848 134.801,107.848 139.802,102.848 139.802,100.025 141.58,98.247 149.621,98.247 150.094,97.774 U1.R5@150.37,97.774